# EAGLE board Qwiic-CO2_Sensor-SCD40-Panel (EAGLE 9.6.2), part 1 of 3
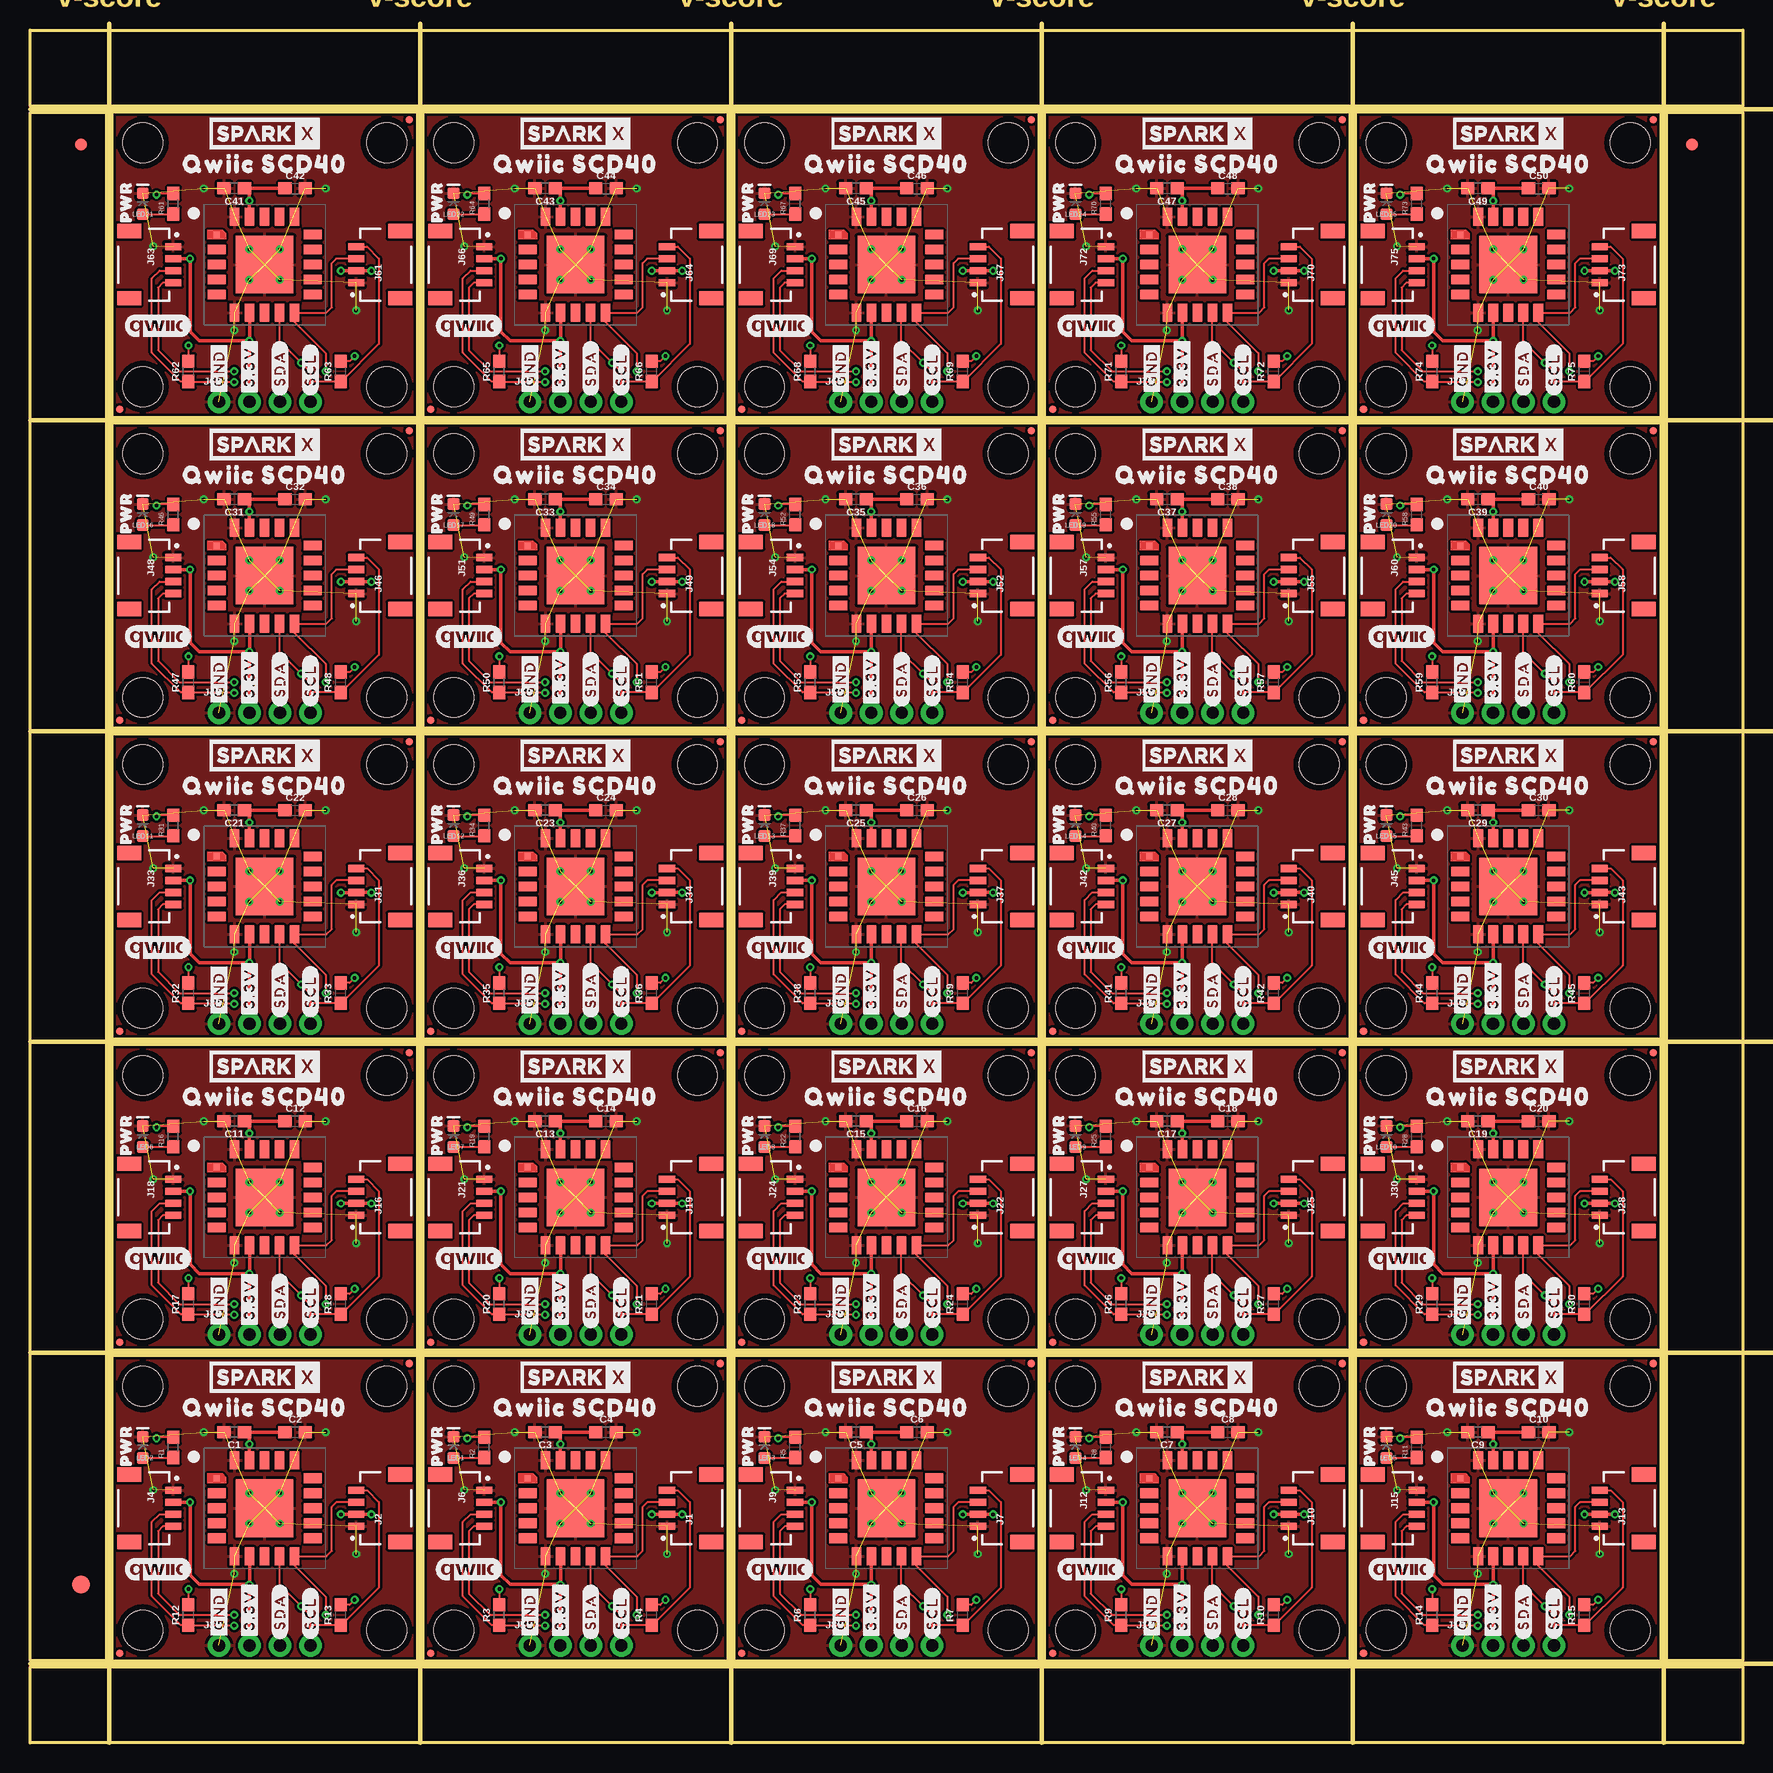
[diagram p0: board, top side]
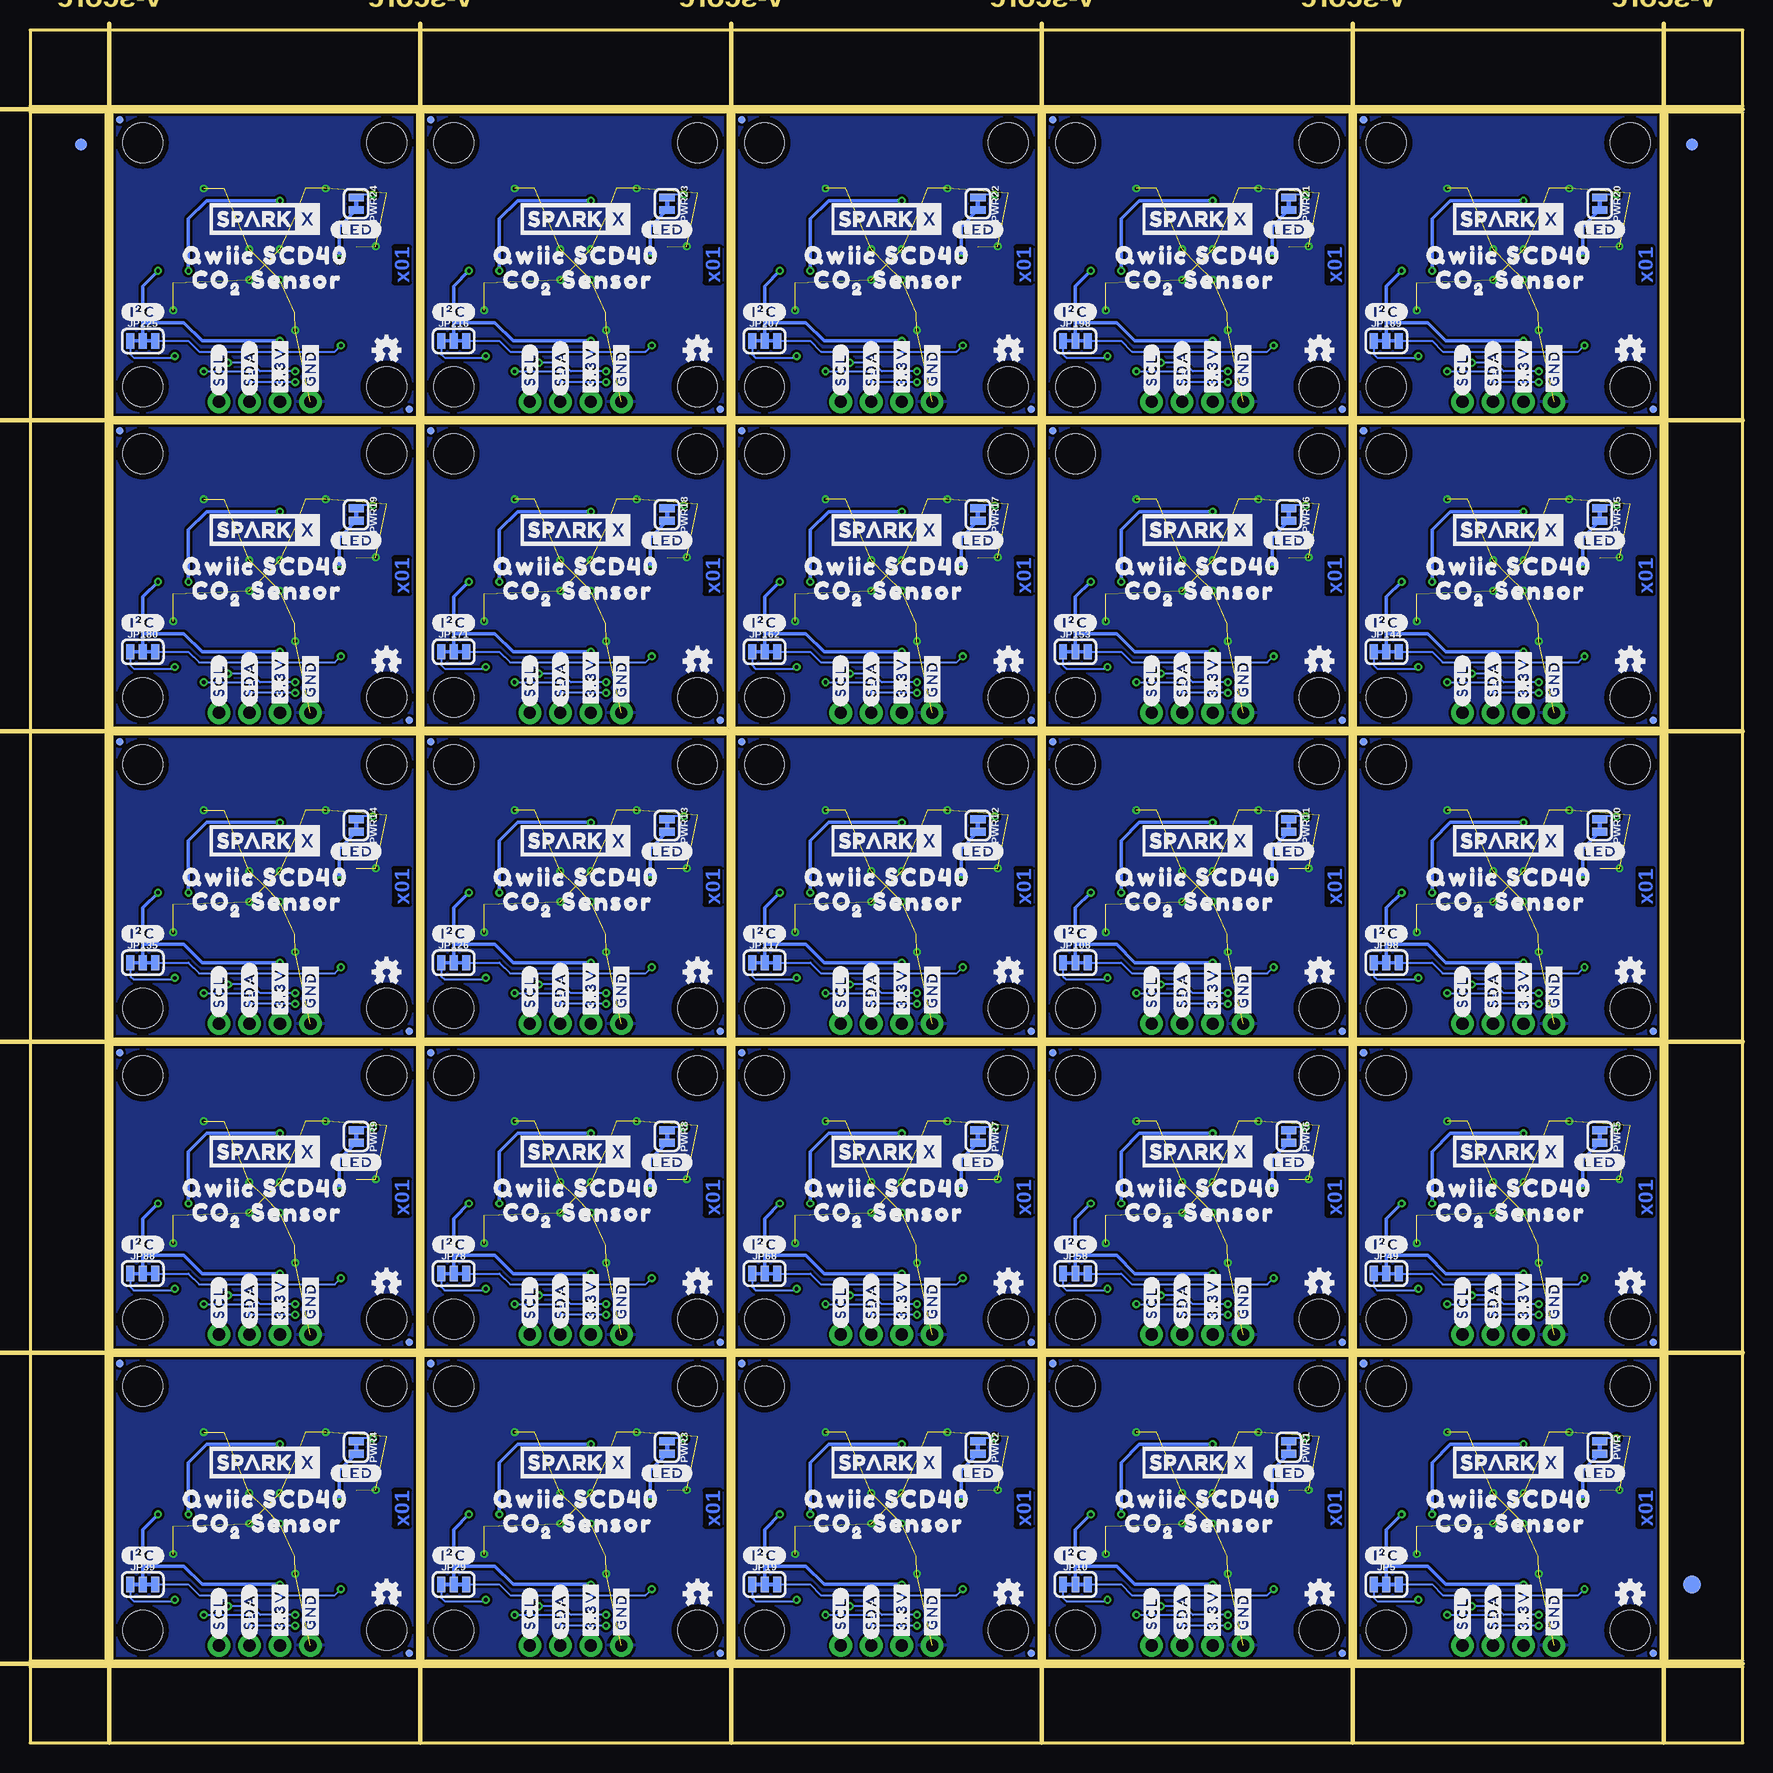
[diagram p1: board, bottom side, seen from below]

Size 142.75 x 142.75 mm. Coordinates in mm from the lower left corner, seen from the top.
Outline: 32.26,6.86 6.86,6.86 6.86,32.26 32.26,32.26 32.26,6.86
Outline: 58.17,6.86 32.77,6.86 32.77,32.26 58.17,32.26 58.17,6.86
Outline: 84.07,6.86 58.67,6.86 58.67,32.26 84.07,32.26 84.07,6.86
Outline: 109.98,6.86 84.58,6.86 84.58,32.26 109.98,32.26 109.98,6.86
Outline: 135.89,6.86 110.49,6.86 110.49,32.26 135.89,32.26 135.89,6.86
Outline: 32.26,32.77 6.86,32.77 6.86,58.17 32.26,58.17 32.26,32.77
Outline: 58.17,32.77 32.77,32.77 32.77,58.17 58.17,58.17 58.17,32.77
Outline: 84.07,32.77 58.67,32.77 58.67,58.17 84.07,58.17 84.07,32.77
Outline: 109.98,32.77 84.58,32.77 84.58,58.17 109.98,58.17 109.98,32.77
Outline: 135.89,32.77 110.49,32.77 110.49,58.17 135.89,58.17 135.89,32.77
Outline: 32.26,58.67 6.86,58.67 6.86,84.07 32.26,84.07 32.26,58.67
Outline: 58.17,58.67 32.77,58.67 32.77,84.07 58.17,84.07 58.17,58.67
Outline: 84.07,58.67 58.67,58.67 58.67,84.07 84.07,84.07 84.07,58.67
Outline: 109.98,58.67 84.58,58.67 84.58,84.07 109.98,84.07 109.98,58.67
Outline: 135.89,58.67 110.49,58.67 110.49,84.07 135.89,84.07 135.89,58.67
Outline: 32.26,84.58 6.86,84.58 6.86,109.98 32.26,109.98 32.26,84.58
Outline: 58.17,84.58 32.77,84.58 32.77,109.98 58.17,109.98 58.17,84.58
Outline: 84.07,84.58 58.67,84.58 58.67,109.98 84.07,109.98 84.07,84.58
Outline: 109.98,84.58 84.58,84.58 84.58,109.98 109.98,109.98 109.98,84.58
Outline: 135.89,84.58 110.49,84.58 110.49,109.98 135.89,109.98 135.89,84.58
Outline: 32.26,110.49 6.86,110.49 6.86,135.89 32.26,135.89 32.26,110.49
Outline: 58.17,110.49 32.77,110.49 32.77,135.89 58.17,135.89 58.17,110.49
Outline: 84.07,110.49 58.67,110.49 58.67,135.89 84.07,135.89 84.07,110.49
Outline: 109.98,110.49 84.58,110.49 84.58,135.89 109.98,135.89 109.98,110.49
Outline: 135.89,110.49 110.49,110.49 110.49,135.89 135.89,135.89 135.89,110.49
Outline: 0,6.35 142.75,6.35 142.75,0 0,0 0,6.35
Outline: 136.4,135.89 142.75,135.89 142.75,6.86 136.4,6.86 136.4,135.89
Outline: 0,142.75 142.75,142.75 142.75,136.4 0,136.4 0,142.75
Outline: 0,135.89 6.35,135.89 6.35,6.86 0,6.86 0,135.89
Copper layers (1*16): Top 0.035mm / dielectric 1.5mm / Bottom 0.035mm
Design rules "Qwiic-CO2_Sensor-SCD40": minimum track width 7mil, minimum drill 0.3mm, track to track 7mil, track to pad 7mil, pad to pad 7mil, via to via 7mil, smd to smd 7mil, copper to edge 7mil, drill to drill 7mil, minimum pad ring 7mil, minimum via ring 7mil, stop-mask expansion 4mil, vias tented up to drill 25mil, thermal gap 10mil
Net classes: 2 3.3V: width 0.305 mm
Milling: 12 lines

## Footprints (pad centres in the part's own frame; a part is rotated, then mirrored left to right if it is on the bottom)
0603 = smd 1.1 x 1: 1 -0.85,0; 2 0.85,0
FIDUCIAL-1X2 = smd 1 x 1: 1 0,0
FIDUCIAL-1.5X3 = smd 1.5 x 1.5: 1 0,0
JST04_1MM_RA = smd 0.6 x 1.35: 1 -1.5,0; 2 -0.5,0; 3 0.5,0; 4 1.5,0 | smd 1.2 x 2: NC1 2.8,-3.675; NC2 -2.8,-3.675
1X04_NO_SILK = drill 1.016 pad 1.88: 1 0,0; 2 2.54,0; 3 5.08,0; 4 7.62,0
STAND-OFF = hole 3.302: 0,0
MICRO-FIDUCIAL = smd 0.635 x 0.635: 1 0,0
SMT-JUMPER_3_2-NC_TRACE_SILK = smd 0.66 x 1.27: 1 -1.041,0; 2 0,0; 3 1.041,0
LED-0603 = smd 1 x 1: A -0.877,0; C 0.877,0
SMT-JUMPER_2_NC_TRACE_SILK = smd 0.66 x 1.27: 1 -0.521,0; 2 0.521,0
SCD4X = smd 0.5 x 0.5: 1 -4,2.5 | smd 1.5 x 0.8: 2 -4,1.25; 3 -4,0; 4 -4,-1.25; 5 -4,-2.5; 11 4,-2.5; 12 4,-1.25; 13 4,0; 14 4,1.25; 15 4,2.5 | smd 0.8 x 1.5: 6 -2.5,-4; 7 -1.25,-4; 8 0,-4; 9 1.25,-4; 10 2.5,-4; 16 2.5,4; 17 1.25,4; 18 0,4; 19 -1.25,4; 20 -2.5,4 | smd 4.8 x 4.8: CP 0,0

## Placement (x,y rotation side)
C1  0.1uF  [0603]  17.02,25.91 180 top
C2  4.7uF  [0603]  22.1,25.91 0 top
C3  0.1uF  [0603]  42.93,25.91 180 top
C4  4.7uF  [0603]  48.01,25.91 0 top
C5  0.1uF  [0603]  68.83,25.91 180 top
C6  4.7uF  [0603]  73.91,25.91 0 top
C7  0.1uF  [0603]  94.74,25.91 180 top
C8  4.7uF  [0603]  99.82,25.91 0 top
C9  0.1uF  [0603]  120.65,25.91 180 top
C10  4.7uF  [0603]  125.73,25.91 0 top
C11  0.1uF  [0603]  17.02,51.82 180 top
C12  4.7uF  [0603]  22.1,51.82 0 top
C13  0.1uF  [0603]  42.93,51.82 180 top
C14  4.7uF  [0603]  48.01,51.82 0 top
C15  0.1uF  [0603]  68.83,51.82 180 top
C16  4.7uF  [0603]  73.91,51.82 0 top
C17  0.1uF  [0603]  94.74,51.82 180 top
C18  4.7uF  [0603]  99.82,51.82 0 top
C19  0.1uF  [0603]  120.65,51.82 180 top
C20  4.7uF  [0603]  125.73,51.82 0 top
C21  0.1uF  [0603]  17.02,77.72 180 top
C22  4.7uF  [0603]  22.1,77.72 0 top
C23  0.1uF  [0603]  42.93,77.72 180 top
C24  4.7uF  [0603]  48.01,77.72 0 top
C25  0.1uF  [0603]  68.83,77.72 180 top
C26  4.7uF  [0603]  73.91,77.72 0 top
C27  0.1uF  [0603]  94.74,77.72 180 top
C28  4.7uF  [0603]  99.82,77.72 0 top
C29  0.1uF  [0603]  120.65,77.72 180 top
C30  4.7uF  [0603]  125.73,77.72 0 top
C31  0.1uF  [0603]  17.02,103.63 180 top
C32  4.7uF  [0603]  22.1,103.63 0 top
C33  0.1uF  [0603]  42.93,103.63 180 top
C34  4.7uF  [0603]  48.01,103.63 0 top
C35  0.1uF  [0603]  68.83,103.63 180 top
C36  4.7uF  [0603]  73.91,103.63 0 top
C37  0.1uF  [0603]  94.74,103.63 180 top
C38  4.7uF  [0603]  99.82,103.63 0 top
C39  0.1uF  [0603]  120.65,103.63 180 top
C40  4.7uF  [0603]  125.73,103.63 0 top
C41  0.1uF  [0603]  17.02,129.54 180 top
C42  4.7uF  [0603]  22.1,129.54 0 top
C43  0.1uF  [0603]  42.93,129.54 180 top
C44  4.7uF  [0603]  48.01,129.54 0 top
C45  0.1uF  [0603]  68.83,129.54 180 top
C46  4.7uF  [0603]  73.91,129.54 0 top
C47  0.1uF  [0603]  94.74,129.54 180 top
C48  4.7uF  [0603]  99.82,129.54 0 top
C49  0.1uF  [0603]  120.65,129.54 180 top
C50  4.7uF  [0603]  125.73,129.54 0 top
E$1  [FIDUCIAL-1X2]  4.23,133.22 0 top
E$2  [FIDUCIAL-1X2]  4.23,133.22 0 bottom
E$3  [FIDUCIAL-1X2]  138.51,133.22 0 top
E$4  [FIDUCIAL-1X2]  138.51,133.22 0 bottom
E$5  [FIDUCIAL-1.5X3]  4.23,13.21 0 top
E$6  [FIDUCIAL-1.5X3]  4.23,13.21 0 bottom
J1  Qwiic Right Angle  [JST04_1MM_RA]  53.09,19.56 90 top
J2  Qwiic Right Angle  [JST04_1MM_RA]  27.18,19.56 90 top
J3  PTH  [1X04_NO_SILK]  15.75,8.13 0 top
J4  Qwiic Right Angle  [JST04_1MM_RA]  11.94,19.56 270 top
J5  PTH  [1X04_NO_SILK]  41.66,8.13 0 top
J6  Qwiic Right Angle  [JST04_1MM_RA]  37.85,19.56 270 top
J7  Qwiic Right Angle  [JST04_1MM_RA]  78.99,19.56 90 top
J8  PTH  [1X04_NO_SILK]  67.56,8.13 0 top
J9  Qwiic Right Angle  [JST04_1MM_RA]  63.75,19.56 270 top
J10  Qwiic Right Angle  [JST04_1MM_RA]  104.9,19.56 90 top
J11  PTH  [1X04_NO_SILK]  93.47,8.13 0 top
J12  Qwiic Right Angle  [JST04_1MM_RA]  89.66,19.56 270 top
J13  Qwiic Right Angle  [JST04_1MM_RA]  130.81,19.56 90 top
J14  PTH  [1X04_NO_SILK]  119.38,8.13 0 top
J15  Qwiic Right Angle  [JST04_1MM_RA]  115.57,19.56 270 top
J16  Qwiic Right Angle  [JST04_1MM_RA]  27.18,45.47 90 top
J17  PTH  [1X04_NO_SILK]  15.75,34.04 0 top
J18  Qwiic Right Angle  [JST04_1MM_RA]  11.94,45.47 270 top
J19  Qwiic Right Angle  [JST04_1MM_RA]  53.09,45.47 90 top
J20  PTH  [1X04_NO_SILK]  41.66,34.04 0 top
J21  Qwiic Right Angle  [JST04_1MM_RA]  37.85,45.47 270 top
J22  Qwiic Right Angle  [JST04_1MM_RA]  78.99,45.47 90 top
J23  PTH  [1X04_NO_SILK]  67.56,34.04 0 top
J24  Qwiic Right Angle  [JST04_1MM_RA]  63.75,45.47 270 top
J25  Qwiic Right Angle  [JST04_1MM_RA]  104.9,45.47 90 top
J26  PTH  [1X04_NO_SILK]  93.47,34.04 0 top
J27  Qwiic Right Angle  [JST04_1MM_RA]  89.66,45.47 270 top
J28  Qwiic Right Angle  [JST04_1MM_RA]  130.81,45.47 90 top
J29  PTH  [1X04_NO_SILK]  119.38,34.04 0 top
J30  Qwiic Right Angle  [JST04_1MM_RA]  115.57,45.47 270 top
J31  Qwiic Right Angle  [JST04_1MM_RA]  27.18,71.37 90 top
J32  PTH  [1X04_NO_SILK]  15.75,59.94 0 top
J33  Qwiic Right Angle  [JST04_1MM_RA]  11.94,71.37 270 top
J34  Qwiic Right Angle  [JST04_1MM_RA]  53.09,71.37 90 top
J35  PTH  [1X04_NO_SILK]  41.66,59.94 0 top
J36  Qwiic Right Angle  [JST04_1MM_RA]  37.85,71.37 270 top
J37  Qwiic Right Angle  [JST04_1MM_RA]  78.99,71.37 90 top
J38  PTH  [1X04_NO_SILK]  67.56,59.94 0 top
J39  Qwiic Right Angle  [JST04_1MM_RA]  63.75,71.37 270 top
J40  Qwiic Right Angle  [JST04_1MM_RA]  104.9,71.37 90 top
J41  PTH  [1X04_NO_SILK]  93.47,59.94 0 top
J42  Qwiic Right Angle  [JST04_1MM_RA]  89.66,71.37 270 top
J43  Qwiic Right Angle  [JST04_1MM_RA]  130.81,71.37 90 top
J44  PTH  [1X04_NO_SILK]  119.38,59.94 0 top
J45  Qwiic Right Angle  [JST04_1MM_RA]  115.57,71.37 270 top
J46  Qwiic Right Angle  [JST04_1MM_RA]  27.18,97.28 90 top
J47  PTH  [1X04_NO_SILK]  15.75,85.85 0 top
J48  Qwiic Right Angle  [JST04_1MM_RA]  11.94,97.28 270 top
J49  Qwiic Right Angle  [JST04_1MM_RA]  53.09,97.28 90 top
J50  PTH  [1X04_NO_SILK]  41.66,85.85 0 top
J51  Qwiic Right Angle  [JST04_1MM_RA]  37.85,97.28 270 top
J52  Qwiic Right Angle  [JST04_1MM_RA]  78.99,97.28 90 top
J53  PTH  [1X04_NO_SILK]  67.56,85.85 0 top
J54  Qwiic Right Angle  [JST04_1MM_RA]  63.75,97.28 270 top
J55  Qwiic Right Angle  [JST04_1MM_RA]  104.9,97.28 90 top
J56  PTH  [1X04_NO_SILK]  93.47,85.85 0 top
J57  Qwiic Right Angle  [JST04_1MM_RA]  89.66,97.28 270 top
J58  Qwiic Right Angle  [JST04_1MM_RA]  130.81,97.28 90 top
J59  PTH  [1X04_NO_SILK]  119.38,85.85 0 top
J60  Qwiic Right Angle  [JST04_1MM_RA]  115.57,97.28 270 top
J61  Qwiic Right Angle  [JST04_1MM_RA]  27.18,123.19 90 top
J62  PTH  [1X04_NO_SILK]  15.75,111.76 0 top
J63  Qwiic Right Angle  [JST04_1MM_RA]  11.94,123.19 270 top
J64  Qwiic Right Angle  [JST04_1MM_RA]  53.09,123.19 90 top
J65  PTH  [1X04_NO_SILK]  41.66,111.76 0 top
J66  Qwiic Right Angle  [JST04_1MM_RA]  37.85,123.19 270 top
J67  Qwiic Right Angle  [JST04_1MM_RA]  78.99,123.19 90 top
J68  PTH  [1X04_NO_SILK]  67.56,111.76 0 top
J69  Qwiic Right Angle  [JST04_1MM_RA]  63.75,123.19 270 top
J70  Qwiic Right Angle  [JST04_1MM_RA]  104.9,123.19 90 top
J71  PTH  [1X04_NO_SILK]  93.47,111.76 0 top
J72  Qwiic Right Angle  [JST04_1MM_RA]  89.66,123.19 270 top
J73  Qwiic Right Angle  [JST04_1MM_RA]  130.81,123.19 90 top
J74  PTH  [1X04_NO_SILK]  119.38,111.76 0 top
J75  Qwiic Right Angle  [JST04_1MM_RA]  115.57,123.19 270 top
JP1  STAND-OFF  [STAND-OFF]  35.31,9.4 90 top
JP2  STAND-OFF  [STAND-OFF]  35.31,29.72 90 top
JP3  FIDUCIALUFIDUCIAL  [MICRO-FIDUCIAL]  57.53,31.62 90 top
JP4  FIDUCIALUFIDUCIAL  [MICRO-FIDUCIAL]  33.4,7.49 90 top
JP5  [SMT-JUMPER_3_2-NC_TRACE_SILK]  29.72,13.21 0 bottom
JP6  FIDUCIALUFIDUCIAL  [MICRO-FIDUCIAL]  57.53,31.62 270 bottom
JP7  FIDUCIALUFIDUCIAL  [MICRO-FIDUCIAL]  33.4,7.49 270 bottom
JP8  STAND-OFF  [STAND-OFF]  55.63,9.4 90 top
JP9  STAND-OFF  [STAND-OFF]  55.63,29.72 90 top
JP10  [SMT-JUMPER_3_2-NC_TRACE_SILK]  55.63,13.21 0 bottom
JP11  STAND-OFF  [STAND-OFF]  61.21,9.4 90 top
JP12  STAND-OFF  [STAND-OFF]  61.21,29.72 90 top
JP13  FIDUCIALUFIDUCIAL  [MICRO-FIDUCIAL]  83.44,31.62 90 top
JP14  FIDUCIALUFIDUCIAL  [MICRO-FIDUCIAL]  59.31,7.49 90 top
JP15  FIDUCIALUFIDUCIAL  [MICRO-FIDUCIAL]  83.44,31.62 270 bottom
JP16  FIDUCIALUFIDUCIAL  [MICRO-FIDUCIAL]  59.31,7.49 270 bottom
JP17  STAND-OFF  [STAND-OFF]  81.53,9.4 90 top
JP18  STAND-OFF  [STAND-OFF]  81.53,29.72 90 top
JP19  [SMT-JUMPER_3_2-NC_TRACE_SILK]  81.53,13.21 0 bottom
JP20  STAND-OFF  [STAND-OFF]  87.12,9.4 90 top
JP21  FIDUCIALUFIDUCIAL  [MICRO-FIDUCIAL]  31.62,31.62 90 top
JP22  STAND-OFF  [STAND-OFF]  87.12,29.72 90 top
JP23  FIDUCIALUFIDUCIAL  [MICRO-FIDUCIAL]  109.35,31.62 90 top
JP24  FIDUCIALUFIDUCIAL  [MICRO-FIDUCIAL]  85.22,7.49 90 top
JP25  FIDUCIALUFIDUCIAL  [MICRO-FIDUCIAL]  109.35,31.62 270 bottom
JP26  FIDUCIALUFIDUCIAL  [MICRO-FIDUCIAL]  85.22,7.49 270 bottom
JP27  STAND-OFF  [STAND-OFF]  107.44,9.4 90 top
JP28  STAND-OFF  [STAND-OFF]  107.44,29.72 90 top
JP29  [SMT-JUMPER_3_2-NC_TRACE_SILK]  107.44,13.21 0 bottom
JP30  STAND-OFF  [STAND-OFF]  113.03,9.4 90 top
JP31  STAND-OFF  [STAND-OFF]  9.4,9.4 90 top
JP32  STAND-OFF  [STAND-OFF]  113.03,29.72 90 top
JP33  FIDUCIALUFIDUCIAL  [MICRO-FIDUCIAL]  135.25,31.62 90 top
JP34  FIDUCIALUFIDUCIAL  [MICRO-FIDUCIAL]  111.12,7.49 90 top
JP35  FIDUCIALUFIDUCIAL  [MICRO-FIDUCIAL]  135.25,31.62 270 bottom
JP36  FIDUCIALUFIDUCIAL  [MICRO-FIDUCIAL]  111.12,7.49 270 bottom
JP37  STAND-OFF  [STAND-OFF]  133.35,9.4 90 top
JP38  STAND-OFF  [STAND-OFF]  133.35,29.72 90 top
JP39  [SMT-JUMPER_3_2-NC_TRACE_SILK]  133.35,13.21 0 bottom
JP40  STAND-OFF  [STAND-OFF]  9.4,35.31 90 top
JP41  STAND-OFF  [STAND-OFF]  9.4,29.72 90 top
JP42  STAND-OFF  [STAND-OFF]  9.4,55.63 90 top
JP43  FIDUCIALUFIDUCIAL  [MICRO-FIDUCIAL]  31.62,57.53 90 top
JP44  FIDUCIALUFIDUCIAL  [MICRO-FIDUCIAL]  7.49,33.4 90 top
JP45  FIDUCIALUFIDUCIAL  [MICRO-FIDUCIAL]  31.62,57.53 270 bottom
JP46  FIDUCIALUFIDUCIAL  [MICRO-FIDUCIAL]  7.49,33.4 270 bottom
JP47  STAND-OFF  [STAND-OFF]  29.72,35.31 90 top
JP48  STAND-OFF  [STAND-OFF]  29.72,55.63 90 top
JP49  [SMT-JUMPER_3_2-NC_TRACE_SILK]  29.72,39.12 0 bottom
JP50  STAND-OFF  [STAND-OFF]  35.31,35.31 90 top
JP51  STAND-OFF  [STAND-OFF]  35.31,55.63 90 top
JP52  FIDUCIALUFIDUCIAL  [MICRO-FIDUCIAL]  57.53,57.53 90 top
JP53  FIDUCIALUFIDUCIAL  [MICRO-FIDUCIAL]  33.4,33.4 90 top
JP54  FIDUCIALUFIDUCIAL  [MICRO-FIDUCIAL]  57.53,57.53 270 bottom
JP55  FIDUCIALUFIDUCIAL  [MICRO-FIDUCIAL]  33.4,33.4 270 bottom
JP56  STAND-OFF  [STAND-OFF]  55.63,35.31 90 top
JP57  STAND-OFF  [STAND-OFF]  55.63,55.63 90 top
JP58  [SMT-JUMPER_3_2-NC_TRACE_SILK]  55.63,39.12 0 bottom
JP59  STAND-OFF  [STAND-OFF]  61.21,35.31 90 top
JP60  STAND-OFF  [STAND-OFF]  61.21,55.63 90 top
JP61  FIDUCIALUFIDUCIAL  [MICRO-FIDUCIAL]  7.49,7.49 90 top
JP62  FIDUCIALUFIDUCIAL  [MICRO-FIDUCIAL]  83.44,57.53 90 top
JP63  FIDUCIALUFIDUCIAL  [MICRO-FIDUCIAL]  59.31,33.4 90 top
JP64  FIDUCIALUFIDUCIAL  [MICRO-FIDUCIAL]  83.44,57.53 270 bottom
JP65  FIDUCIALUFIDUCIAL  [MICRO-FIDUCIAL]  59.31,33.4 270 bottom
JP66  STAND-OFF  [STAND-OFF]  81.53,35.31 90 top
JP67  STAND-OFF  [STAND-OFF]  81.53,55.63 90 top
JP68  [SMT-JUMPER_3_2-NC_TRACE_SILK]  81.53,39.12 0 bottom
JP69  STAND-OFF  [STAND-OFF]  87.12,35.31 90 top
JP70  STAND-OFF  [STAND-OFF]  87.12,55.63 90 top
JP71  FIDUCIALUFIDUCIAL  [MICRO-FIDUCIAL]  31.62,31.62 270 bottom
JP72  FIDUCIALUFIDUCIAL  [MICRO-FIDUCIAL]  109.35,57.53 90 top
JP73  FIDUCIALUFIDUCIAL  [MICRO-FIDUCIAL]  85.22,33.4 90 top
JP74  FIDUCIALUFIDUCIAL  [MICRO-FIDUCIAL]  109.35,57.53 270 bottom
JP75  FIDUCIALUFIDUCIAL  [MICRO-FIDUCIAL]  85.22,33.4 270 bottom
JP76  STAND-OFF  [STAND-OFF]  107.44,35.31 90 top
JP77  STAND-OFF  [STAND-OFF]  107.44,55.63 90 top
JP78  [SMT-JUMPER_3_2-NC_TRACE_SILK]  107.44,39.12 0 bottom
JP79  STAND-OFF  [STAND-OFF]  113.03,35.31 90 top
JP80  STAND-OFF  [STAND-OFF]  113.03,55.63 90 top
JP81  FIDUCIALUFIDUCIAL  [MICRO-FIDUCIAL]  7.49,7.49 270 bottom
JP82  FIDUCIALUFIDUCIAL  [MICRO-FIDUCIAL]  135.25,57.53 90 top
JP83  FIDUCIALUFIDUCIAL  [MICRO-FIDUCIAL]  111.12,33.4 90 top
JP84  FIDUCIALUFIDUCIAL  [MICRO-FIDUCIAL]  135.25,57.53 270 bottom
JP85  FIDUCIALUFIDUCIAL  [MICRO-FIDUCIAL]  111.12,33.4 270 bottom
JP86  STAND-OFF  [STAND-OFF]  133.35,35.31 90 top
JP87  STAND-OFF  [STAND-OFF]  133.35,55.63 90 top
JP88  [SMT-JUMPER_3_2-NC_TRACE_SILK]  133.35,39.12 0 bottom
JP89  STAND-OFF  [STAND-OFF]  9.4,61.21 90 top
JP90  STAND-OFF  [STAND-OFF]  9.4,81.53 90 top
JP91  STAND-OFF  [STAND-OFF]  29.72,9.4 90 top
JP92  FIDUCIALUFIDUCIAL  [MICRO-FIDUCIAL]  31.62,83.44 90 top
JP93  FIDUCIALUFIDUCIAL  [MICRO-FIDUCIAL]  7.49,59.31 90 top
JP94  FIDUCIALUFIDUCIAL  [MICRO-FIDUCIAL]  31.62,83.44 270 bottom
JP95  FIDUCIALUFIDUCIAL  [MICRO-FIDUCIAL]  7.49,59.31 270 bottom
JP96  STAND-OFF  [STAND-OFF]  29.72,61.21 90 top
JP97  STAND-OFF  [STAND-OFF]  29.72,81.53 90 top
JP98  [SMT-JUMPER_3_2-NC_TRACE_SILK]  29.72,65.02 0 bottom
JP99  STAND-OFF  [STAND-OFF]  35.31,61.21 90 top
JP100  STAND-OFF  [STAND-OFF]  35.31,81.53 90 top
JP101  STAND-OFF  [STAND-OFF]  29.72,29.72 90 top
JP102  FIDUCIALUFIDUCIAL  [MICRO-FIDUCIAL]  57.53,83.44 90 top
JP103  FIDUCIALUFIDUCIAL  [MICRO-FIDUCIAL]  33.4,59.31 90 top
JP104  FIDUCIALUFIDUCIAL  [MICRO-FIDUCIAL]  57.53,83.44 270 bottom
JP105  FIDUCIALUFIDUCIAL  [MICRO-FIDUCIAL]  33.4,59.31 270 bottom
JP106  STAND-OFF  [STAND-OFF]  55.63,61.21 90 top
JP107  STAND-OFF  [STAND-OFF]  55.63,81.53 90 top
JP108  [SMT-JUMPER_3_2-NC_TRACE_SILK]  55.63,65.02 0 bottom
JP109  STAND-OFF  [STAND-OFF]  61.21,61.21 90 top
JP110  STAND-OFF  [STAND-OFF]  61.21,81.53 90 top
JP111  FIDUCIALUFIDUCIAL  [MICRO-FIDUCIAL]  83.44,83.44 90 top
JP112  FIDUCIALUFIDUCIAL  [MICRO-FIDUCIAL]  59.31,59.31 90 top
JP113  FIDUCIALUFIDUCIAL  [MICRO-FIDUCIAL]  83.44,83.44 270 bottom
JP114  FIDUCIALUFIDUCIAL  [MICRO-FIDUCIAL]  59.31,59.31 270 bottom
JP115  STAND-OFF  [STAND-OFF]  81.53,61.21 90 top
JP116  STAND-OFF  [STAND-OFF]  81.53,81.53 90 top
JP117  [SMT-JUMPER_3_2-NC_TRACE_SILK]  81.53,65.02 0 bottom
JP118  STAND-OFF  [STAND-OFF]  87.12,61.21 90 top
JP119  STAND-OFF  [STAND-OFF]  87.12,81.53 90 top
JP120  FIDUCIALUFIDUCIAL  [MICRO-FIDUCIAL]  109.35,83.44 90 top
JP121  FIDUCIALUFIDUCIAL  [MICRO-FIDUCIAL]  85.22,59.31 90 top
JP122  FIDUCIALUFIDUCIAL  [MICRO-FIDUCIAL]  109.35,83.44 270 bottom
JP123  FIDUCIALUFIDUCIAL  [MICRO-FIDUCIAL]  85.22,59.31 270 bottom
JP124  STAND-OFF  [STAND-OFF]  107.44,61.21 90 top
JP125  STAND-OFF  [STAND-OFF]  107.44,81.53 90 top
JP126  [SMT-JUMPER_3_2-NC_TRACE_SILK]  107.44,65.02 0 bottom
JP127  STAND-OFF  [STAND-OFF]  113.03,61.21 90 top
JP128  STAND-OFF  [STAND-OFF]  113.03,81.53 90 top
JP129  FIDUCIALUFIDUCIAL  [MICRO-FIDUCIAL]  135.25,83.44 90 top
JP130  FIDUCIALUFIDUCIAL  [MICRO-FIDUCIAL]  111.12,59.31 90 top
JP131  FIDUCIALUFIDUCIAL  [MICRO-FIDUCIAL]  135.25,83.44 270 bottom
JP132  FIDUCIALUFIDUCIAL  [MICRO-FIDUCIAL]  111.12,59.31 270 bottom
JP133  STAND-OFF  [STAND-OFF]  133.35,61.21 90 top
JP134  STAND-OFF  [STAND-OFF]  133.35,81.53 90 top
JP135  [SMT-JUMPER_3_2-NC_TRACE_SILK]  133.35,65.02 0 bottom
JP136  STAND-OFF  [STAND-OFF]  9.4,87.12 90 top
JP137  STAND-OFF  [STAND-OFF]  9.4,107.44 90 top
JP138  FIDUCIALUFIDUCIAL  [MICRO-FIDUCIAL]  31.62,109.35 90 top
JP139  FIDUCIALUFIDUCIAL  [MICRO-FIDUCIAL]  7.49,85.22 90 top
JP140  FIDUCIALUFIDUCIAL  [MICRO-FIDUCIAL]  31.62,109.35 270 bottom
JP141  FIDUCIALUFIDUCIAL  [MICRO-FIDUCIAL]  7.49,85.22 270 bottom
JP142  STAND-OFF  [STAND-OFF]  29.72,87.12 90 top
JP143  STAND-OFF  [STAND-OFF]  29.72,107.44 90 top
JP144  [SMT-JUMPER_3_2-NC_TRACE_SILK]  29.72,90.93 0 bottom
JP145  STAND-OFF  [STAND-OFF]  35.31,87.12 90 top
JP146  STAND-OFF  [STAND-OFF]  35.31,107.44 90 top
JP147  FIDUCIALUFIDUCIAL  [MICRO-FIDUCIAL]  57.53,109.35 90 top
JP148  FIDUCIALUFIDUCIAL  [MICRO-FIDUCIAL]  33.4,85.22 90 top
JP149  FIDUCIALUFIDUCIAL  [MICRO-FIDUCIAL]  57.53,109.35 270 bottom
JP150  FIDUCIALUFIDUCIAL  [MICRO-FIDUCIAL]  33.4,85.22 270 bottom
JP151  STAND-OFF  [STAND-OFF]  55.63,87.12 90 top
JP152  STAND-OFF  [STAND-OFF]  55.63,107.44 90 top
JP153  [SMT-JUMPER_3_2-NC_TRACE_SILK]  55.63,90.93 0 bottom
JP154  STAND-OFF  [STAND-OFF]  61.21,87.12 90 top
JP155  STAND-OFF  [STAND-OFF]  61.21,107.44 90 top
JP156  FIDUCIALUFIDUCIAL  [MICRO-FIDUCIAL]  83.44,109.35 90 top
JP157  FIDUCIALUFIDUCIAL  [MICRO-FIDUCIAL]  59.31,85.22 90 top
JP158  FIDUCIALUFIDUCIAL  [MICRO-FIDUCIAL]  83.44,109.35 270 bottom
JP159  FIDUCIALUFIDUCIAL  [MICRO-FIDUCIAL]  59.31,85.22 270 bottom
JP160  STAND-OFF  [STAND-OFF]  81.53,87.12 90 top
JP161  STAND-OFF  [STAND-OFF]  81.53,107.44 90 top
JP162  [SMT-JUMPER_3_2-NC_TRACE_SILK]  81.53,90.93 0 bottom
JP163  STAND-OFF  [STAND-OFF]  87.12,87.12 90 top
JP164  STAND-OFF  [STAND-OFF]  87.12,107.44 90 top
JP165  FIDUCIALUFIDUCIAL  [MICRO-FIDUCIAL]  109.35,109.35 90 top
JP166  FIDUCIALUFIDUCIAL  [MICRO-FIDUCIAL]  85.22,85.22 90 top
JP167  FIDUCIALUFIDUCIAL  [MICRO-FIDUCIAL]  109.35,109.35 270 bottom
JP168  FIDUCIALUFIDUCIAL  [MICRO-FIDUCIAL]  85.22,85.22 270 bottom
JP169  STAND-OFF  [STAND-OFF]  107.44,87.12 90 top
JP170  STAND-OFF  [STAND-OFF]  107.44,107.44 90 top
JP171  [SMT-JUMPER_3_2-NC_TRACE_SILK]  107.44,90.93 0 bottom
JP172  STAND-OFF  [STAND-OFF]  113.03,87.12 90 top
JP173  STAND-OFF  [STAND-OFF]  113.03,107.44 90 top
JP174  FIDUCIALUFIDUCIAL  [MICRO-FIDUCIAL]  135.25,109.35 90 top
JP175  FIDUCIALUFIDUCIAL  [MICRO-FIDUCIAL]  111.12,85.22 90 top
JP176  FIDUCIALUFIDUCIAL  [MICRO-FIDUCIAL]  135.25,109.35 270 bottom
JP177  FIDUCIALUFIDUCIAL  [MICRO-FIDUCIAL]  111.12,85.22 270 bottom
JP178  STAND-OFF  [STAND-OFF]  133.35,87.12 90 top
JP179  STAND-OFF  [STAND-OFF]  133.35,107.44 90 top
JP180  [SMT-JUMPER_3_2-NC_TRACE_SILK]  133.35,90.93 0 bottom
JP181  STAND-OFF  [STAND-OFF]  9.4,113.03 90 top
JP182  STAND-OFF  [STAND-OFF]  9.4,133.35 90 top
JP183  FIDUCIALUFIDUCIAL  [MICRO-FIDUCIAL]  31.62,135.25 90 top
JP184  FIDUCIALUFIDUCIAL  [MICRO-FIDUCIAL]  7.49,111.12 90 top
JP185  FIDUCIALUFIDUCIAL  [MICRO-FIDUCIAL]  31.62,135.25 270 bottom
JP186  FIDUCIALUFIDUCIAL  [MICRO-FIDUCIAL]  7.49,111.12 270 bottom
JP187  STAND-OFF  [STAND-OFF]  29.72,113.03 90 top
JP188  STAND-OFF  [STAND-OFF]  29.72,133.35 90 top
JP189  [SMT-JUMPER_3_2-NC_TRACE_SILK]  29.72,116.84 0 bottom
JP190  STAND-OFF  [STAND-OFF]  35.31,113.03 90 top
JP191  STAND-OFF  [STAND-OFF]  35.31,133.35 90 top
JP192  FIDUCIALUFIDUCIAL  [MICRO-FIDUCIAL]  57.53,135.25 90 top
JP193  FIDUCIALUFIDUCIAL  [MICRO-FIDUCIAL]  33.4,111.12 90 top
JP194  FIDUCIALUFIDUCIAL  [MICRO-FIDUCIAL]  57.53,135.25 270 bottom
JP195  FIDUCIALUFIDUCIAL  [MICRO-FIDUCIAL]  33.4,111.12 270 bottom
JP196  STAND-OFF  [STAND-OFF]  55.63,113.03 90 top
JP197  STAND-OFF  [STAND-OFF]  55.63,133.35 90 top
JP198  [SMT-JUMPER_3_2-NC_TRACE_SILK]  55.63,116.84 0 bottom
JP199  STAND-OFF  [STAND-OFF]  61.21,113.03 90 top
JP200  STAND-OFF  [STAND-OFF]  61.21,133.35 90 top
JP201  FIDUCIALUFIDUCIAL  [MICRO-FIDUCIAL]  83.44,135.25 90 top
JP202  FIDUCIALUFIDUCIAL  [MICRO-FIDUCIAL]  59.31,111.12 90 top
JP203  FIDUCIALUFIDUCIAL  [MICRO-FIDUCIAL]  83.44,135.25 270 bottom
JP204  FIDUCIALUFIDUCIAL  [MICRO-FIDUCIAL]  59.31,111.12 270 bottom
JP205  STAND-OFF  [STAND-OFF]  81.53,113.03 90 top
JP206  STAND-OFF  [STAND-OFF]  81.53,133.35 90 top
JP207  [SMT-JUMPER_3_2-NC_TRACE_SILK]  81.53,116.84 0 bottom
JP208  STAND-OFF  [STAND-OFF]  87.12,113.03 90 top
JP209  STAND-OFF  [STAND-OFF]  87.12,133.35 90 top
JP210  FIDUCIALUFIDUCIAL  [MICRO-FIDUCIAL]  109.35,135.25 90 top
JP211  FIDUCIALUFIDUCIAL  [MICRO-FIDUCIAL]  85.22,111.12 90 top
JP212  FIDUCIALUFIDUCIAL  [MICRO-FIDUCIAL]  109.35,135.25 270 bottom
JP213  FIDUCIALUFIDUCIAL  [MICRO-FIDUCIAL]  85.22,111.12 270 bottom
JP214  STAND-OFF  [STAND-OFF]  107.44,113.03 90 top
JP215  STAND-OFF  [STAND-OFF]  107.44,133.35 90 top
JP216  [SMT-JUMPER_3_2-NC_TRACE_SILK]  107.44,116.84 0 bottom
JP217  STAND-OFF  [STAND-OFF]  113.03,113.03 90 top
JP218  STAND-OFF  [STAND-OFF]  113.03,133.35 90 top
JP219  FIDUCIALUFIDUCIAL  [MICRO-FIDUCIAL]  135.25,135.25 90 top
JP220  FIDUCIALUFIDUCIAL  [MICRO-FIDUCIAL]  111.12,111.12 90 top
JP221  FIDUCIALUFIDUCIAL  [MICRO-FIDUCIAL]  135.25,135.25 270 bottom
JP222  FIDUCIALUFIDUCIAL  [MICRO-FIDUCIAL]  111.12,111.12 270 bottom
JP223  STAND-OFF  [STAND-OFF]  133.35,113.03 90 top
JP224  STAND-OFF  [STAND-OFF]  133.35,133.35 90 top
JP225  [SMT-JUMPER_3_2-NC_TRACE_SILK]  133.35,116.84 0 bottom
LED1  RED  [LED-0603]  35.31,24.64 90 top
LED2  RED  [LED-0603]  9.4,24.64 90 top
LED3  RED  [LED-0603]  61.21,24.64 90 top
LED4  RED  [LED-0603]  87.12,24.64 90 top
LED5  RED  [LED-0603]  113.03,24.64 90 top
LED6  RED  [LED-0603]  9.4,50.55 90 top
LED7  RED  [LED-0603]  35.31,50.55 90 top
LED8  RED  [LED-0603]  61.21,50.55 90 top
LED9  RED  [LED-0603]  87.12,50.55 90 top
LED10  RED  [LED-0603]  113.03,50.55 90 top
LED11  RED  [LED-0603]  9.4,76.45 90 top
LED12  RED  [LED-0603]  35.31,76.45 90 top
LED13  RED  [LED-0603]  61.21,76.45 90 top
LED14  RED  [LED-0603]  87.12,76.45 90 top
LED15  RED  [LED-0603]  113.03,76.45 90 top
LED16  RED  [LED-0603]  9.4,102.36 90 top
LED17  RED  [LED-0603]  35.31,102.36 90 top
LED18  RED  [LED-0603]  61.21,102.36 90 top
LED19  RED  [LED-0603]  87.12,102.36 90 top
LED20  RED  [LED-0603]  113.03,102.36 90 top
LED21  RED  [LED-0603]  9.4,128.27 90 top
LED22  RED  [LED-0603]  35.31,128.27 90 top
LED23  RED  [LED-0603]  61.21,128.27 90 top
LED24  RED  [LED-0603]  87.12,128.27 90 top
LED25  RED  [LED-0603]  113.03,128.27 90 top
LOGO1  OSHW-LOGOMINI  [OSHW-LOGO-MINI]  9.4,12.45 0 bottom
LOGO2  OSHW-LOGOMINI  [OSHW-LOGO-MINI]  35.31,12.45 0 bottom
LOGO3  OSHW-LOGOMINI  [OSHW-LOGO-MINI]  61.21,12.45 0 bottom
LOGO4  OSHW-LOGOMINI  [OSHW-LOGO-MINI]  87.12,12.45 0 bottom
LOGO5  OSHW-LOGOMINI  [OSHW-LOGO-MINI]  113.03,12.45 0 bottom
LOGO6  OSHW-LOGOMINI  [OSHW-LOGO-MINI]  9.4,38.35 0 bottom
LOGO7  OSHW-LOGOMINI  [OSHW-LOGO-MINI]  35.31,38.35 0 bottom
LOGO8  OSHW-LOGOMINI  [OSHW-LOGO-MINI]  61.21,38.35 0 bottom
LOGO9  OSHW-LOGOMINI  [OSHW-LOGO-MINI]  87.12,38.35 0 bottom
LOGO10  OSHW-LOGOMINI  [OSHW-LOGO-MINI]  113.03,38.35 0 bottom
LOGO11  OSHW-LOGOMINI  [OSHW-LOGO-MINI]  9.4,64.26 0 bottom
LOGO12  OSHW-LOGOMINI  [OSHW-LOGO-MINI]  35.31,64.26 0 bottom
LOGO13  OSHW-LOGOMINI  [OSHW-LOGO-MINI]  61.21,64.26 0 bottom
LOGO14  OSHW-LOGOMINI  [OSHW-LOGO-MINI]  87.12,64.26 0 bottom
LOGO15  OSHW-LOGOMINI  [OSHW-LOGO-MINI]  113.03,64.26 0 bottom
LOGO16  OSHW-LOGOMINI  [OSHW-LOGO-MINI]  9.4,90.17 0 bottom
LOGO17  OSHW-LOGOMINI  [OSHW-LOGO-MINI]  35.31,90.17 0 bottom
LOGO18  OSHW-LOGOMINI  [OSHW-LOGO-MINI]  61.21,90.17 0 bottom
LOGO19  OSHW-LOGOMINI  [OSHW-LOGO-MINI]  87.12,90.17 0 bottom
LOGO20  OSHW-LOGOMINI  [OSHW-LOGO-MINI]  113.03,90.17 0 bottom
LOGO21  OSHW-LOGOMINI  [OSHW-LOGO-MINI]  9.4,116.08 0 bottom
LOGO22  OSHW-LOGOMINI  [OSHW-LOGO-MINI]  35.31,116.08 0 bottom
LOGO23  OSHW-LOGOMINI  [OSHW-LOGO-MINI]  61.21,116.08 0 bottom
LOGO24  OSHW-LOGOMINI  [OSHW-LOGO-MINI]  87.12,116.08 0 bottom
LOGO25  OSHW-LOGOMINI  [OSHW-LOGO-MINI]  113.03,116.08 0 bottom
PWR  [SMT-JUMPER_2_NC_TRACE_SILK]  11.94,24.64 270 bottom
PWR1  [SMT-JUMPER_2_NC_TRACE_SILK]  37.85,24.64 270 bottom
PWR2  [SMT-JUMPER_2_NC_TRACE_SILK]  63.75,24.64 270 bottom
PWR3  [SMT-JUMPER_2_NC_TRACE_SILK]  89.66,24.64 270 bottom
PWR4  [SMT-JUMPER_2_NC_TRACE_SILK]  115.57,24.64 270 bottom
PWR5  [SMT-JUMPER_2_NC_TRACE_SILK]  11.94,50.55 270 bottom
PWR6  [SMT-JUMPER_2_NC_TRACE_SILK]  37.85,50.55 270 bottom
PWR7  [SMT-JUMPER_2_NC_TRACE_SILK]  63.75,50.55 270 bottom
PWR8  [SMT-JUMPER_2_NC_TRACE_SILK]  89.66,50.55 270 bottom
PWR9  [SMT-JUMPER_2_NC_TRACE_SILK]  115.57,50.55 270 bottom
PWR10  [SMT-JUMPER_2_NC_TRACE_SILK]  11.94,76.45 270 bottom
PWR11  [SMT-JUMPER_2_NC_TRACE_SILK]  37.85,76.45 270 bottom
PWR12  [SMT-JUMPER_2_NC_TRACE_SILK]  63.75,76.45 270 bottom
PWR13  [SMT-JUMPER_2_NC_TRACE_SILK]  89.66,76.45 270 bottom
PWR14  [SMT-JUMPER_2_NC_TRACE_SILK]  115.57,76.45 270 bottom
PWR15  [SMT-JUMPER_2_NC_TRACE_SILK]  11.94,102.36 270 bottom
PWR16  [SMT-JUMPER_2_NC_TRACE_SILK]  37.85,102.36 270 bottom
PWR17  [SMT-JUMPER_2_NC_TRACE_SILK]  63.75,102.36 270 bottom
PWR18  [SMT-JUMPER_2_NC_TRACE_SILK]  89.66,102.36 270 bottom
PWR19  [SMT-JUMPER_2_NC_TRACE_SILK]  115.57,102.36 270 bottom
PWR20  [SMT-JUMPER_2_NC_TRACE_SILK]  11.94,128.27 270 bottom
PWR21  [SMT-JUMPER_2_NC_TRACE_SILK]  37.85,128.27 270 bottom
PWR22  [SMT-JUMPER_2_NC_TRACE_SILK]  63.75,128.27 270 bottom
PWR23  [SMT-JUMPER_2_NC_TRACE_SILK]  89.66,128.27 270 bottom
PWR24  [SMT-JUMPER_2_NC_TRACE_SILK]  115.57,128.27 270 bottom
R1  1k  [0603]  11.94,24.64 90 top
R2  1k  [0603]  37.85,24.64 90 top
R3  2.2k  [0603]  39.12,10.67 90 top
R4  2.2k  [0603]  51.82,10.67 90 top
R5  1k  [0603]  63.75,24.64 90 top
R6  2.2k  [0603]  65.02,10.67 90 top
R7  2.2k  [0603]  77.72,10.67 90 top
R8  1k  [0603]  89.66,24.64 90 top
R9  2.2k  [0603]  90.93,10.67 90 top
R10  2.2k  [0603]  103.63,10.67 90 top
R11  1k  [0603]  115.57,24.64 90 top
R12  2.2k  [0603]  13.21,10.67 90 top
R13  2.2k  [0603]  25.91,10.67 90 top
R14  2.2k  [0603]  116.84,10.67 90 top
R15  2.2k  [0603]  129.54,10.67 90 top
R16  1k  [0603]  11.94,50.55 90 top
R17  2.2k  [0603]  13.21,36.58 90 top
R18  2.2k  [0603]  25.91,36.58 90 top
R19  1k  [0603]  37.85,50.55 90 top
R20  2.2k  [0603]  39.12,36.58 90 top
R21  2.2k  [0603]  51.82,36.58 90 top
R22  1k  [0603]  63.75,50.55 90 top
R23  2.2k  [0603]  65.02,36.58 90 top
R24  2.2k  [0603]  77.72,36.58 90 top
R25  1k  [0603]  89.66,50.55 90 top
R26  2.2k  [0603]  90.93,36.58 90 top
R27  2.2k  [0603]  103.63,36.58 90 top
R28  1k  [0603]  115.57,50.55 90 top
R29  2.2k  [0603]  116.84,36.58 90 top
R30  2.2k  [0603]  129.54,36.58 90 top
R31  1k  [0603]  11.94,76.45 90 top
R32  2.2k  [0603]  13.21,62.48 90 top
R33  2.2k  [0603]  25.91,62.48 90 top
R34  1k  [0603]  37.85,76.45 90 top
R35  2.2k  [0603]  39.12,62.48 90 top
R36  2.2k  [0603]  51.82,62.48 90 top
R37  1k  [0603]  63.75,76.45 90 top
R38  2.2k  [0603]  65.02,62.48 90 top
R39  2.2k  [0603]  77.72,62.48 90 top
R40  1k  [0603]  89.66,76.45 90 top
R41  2.2k  [0603]  90.93,62.48 90 top
R42  2.2k  [0603]  103.63,62.48 90 top
R43  1k  [0603]  115.57,76.45 90 top
R44  2.2k  [0603]  116.84,62.48 90 top
R45  2.2k  [0603]  129.54,62.48 90 top
R46  1k  [0603]  11.94,102.36 90 top
R47  2.2k  [0603]  13.21,88.39 90 top
R48  2.2k  [0603]  25.91,88.39 90 top
R49  1k  [0603]  37.85,102.36 90 top
R50  2.2k  [0603]  39.12,88.39 90 top
R51  2.2k  [0603]  51.82,88.39 90 top
R52  1k  [0603]  63.75,102.36 90 top
R53  2.2k  [0603]  65.02,88.39 90 top
R54  2.2k  [0603]  77.72,88.39 90 top
R55  1k  [0603]  89.66,102.36 90 top
R56  2.2k  [0603]  90.93,88.39 90 top
R57  2.2k  [0603]  103.63,88.39 90 top
R58  1k  [0603]  115.57,102.36 90 top
R59  2.2k  [0603]  116.84,88.39 90 top
R60  2.2k  [0603]  129.54,88.39 90 top
R61  1k  [0603]  11.94,128.27 90 top
R62  2.2k  [0603]  13.21,114.3 90 top
R63  2.2k  [0603]  25.91,114.3 90 top
R64  1k  [0603]  37.85,128.27 90 top
R65  2.2k  [0603]  39.12,114.3 90 top
R66  2.2k  [0603]  51.82,114.3 90 top
R67  1k  [0603]  63.75,128.27 90 top
R68  2.2k  [0603]  65.02,114.3 90 top
R69  2.2k  [0603]  77.72,114.3 90 top
R70  1k  [0603]  89.66,128.27 90 top
R71  2.2k  [0603]  90.93,114.3 90 top
R72  2.2k  [0603]  103.63,114.3 90 top
R73  1k  [0603]  115.57,128.27 90 top
R74  2.2k  [0603]  116.84,114.3 90 top
R75  2.2k  [0603]  129.54,114.3 90 top
U1  SCD4X  [SCD4X]  45.47,19.56 0 top
U2  SCD4X  [SCD4X]  71.37,19.56 0 top
U3  SCD4X  [SCD4X]  19.56,19.56 0 top
U4  SCD4X  [SCD4X]  97.28,19.56 0 top
U5  SCD4X  [SCD4X]  123.19,19.56 0 top
U6  SCD4X  [SCD4X]  19.56,45.47 0 top
U7  SCD4X  [SCD4X]  45.47,45.47 0 top
U8  SCD4X  [SCD4X]  71.37,45.47 0 top
U9  SCD4X  [SCD4X]  97.28,45.47 0 top
U10  SCD4X  [SCD4X]  123.19,45.47 0 top
U11  SCD4X  [SCD4X]  19.56,71.37 0 top
U12  SCD4X  [SCD4X]  45.47,71.37 0 top
U13  SCD4X  [SCD4X]  71.37,71.37 0 top
U14  SCD4X  [SCD4X]  97.28,71.37 0 top
U15  SCD4X  [SCD4X]  123.19,71.37 0 top
U16  SCD4X  [SCD4X]  19.56,97.28 0 top
U17  SCD4X  [SCD4X]  45.47,97.28 0 top
U18  SCD4X  [SCD4X]  71.37,97.28 0 top
U19  SCD4X  [SCD4X]  97.28,97.28 0 top
U20  SCD4X  [SCD4X]  123.19,97.28 0 top
U21  SCD4X  [SCD4X]  19.56,123.19 0 top
U22  SCD4X  [SCD4X]  45.47,123.19 0 top
U23  SCD4X  [SCD4X]  71.37,123.19 0 top
U24  SCD4X  [SCD4X]  97.28,123.19 0 top
U25  SCD4X  [SCD4X]  123.19,123.19 0 top
U$1  [CO1]  24,18.29 0 bottom
U$2  [SCD400]  22.86,27.94 0 top
U$3  [QWIIC0]  15.75,27.94 0 top
U$4  [QWIIC0]  23.37,20.32 0 bottom
U$5  SPARKX-LOGO4  [SPARKX-MEDIUM]  19.56,30.48 0 top
U$6  [#3#3V#0]  18.29,11.05 90 bottom
U$7  [#SDA#0]  20.83,10.92 90 bottom
U$8  [#SCL#0]  23.37,10.79 90 bottom
U$9  [#GND#0]  15.75,10.92 90 bottom
U$10  [#I�C#1]  29.72,15.62 0 bottom
U$11  [SCD400]  16.13,20.32 0 bottom
U$12  [PWR0]  8,24.77 90 top
U$13  [SENSOR3]  16.89,18.29 0 bottom
U$14  [20]  21.97,17.53 0 bottom
U$15  SPARKX-LOGO4  [SPARKX-MEDIUM]  45.47,30.48 0 top
U$16  [#3#3V#0]  44.2,11.05 90 top
U$17  [#SDA#0]  46.74,10.92 90 top
U$18  [#SCL#0]  49.28,10.79 90 top
U$19  [#3#3V#0]  44.2,11.05 90 bottom
U$20  [#SDA#0]  46.74,10.92 90 bottom
U$21  [#SCL#0]  49.28,10.79 90 bottom
U$22  [#GND#0]  41.66,10.92 90 top
U$23  [#LED#0]  11.94,22.48 0 bottom
U$24  [#GND#0]  41.66,10.92 90 bottom
U$25  [#I�C#1]  55.63,15.62 0 bottom
U$26  [PWR0]  33.91,24.77 90 top
U$27  [#LED#0]  37.85,22.48 0 bottom
U$28  SPARKX-LOGO4  [SPARKX-MEDIUM]  45.47,23.37 0 bottom
U$29  [QWIIC_5.5MM]  36.58,14.48 0 top
U$30  [CO1]  49.91,18.29 0 bottom
U$31  [QWIIC0]  41.66,27.94 0 top
U$32  [QWIIC0]  49.28,20.32 0 bottom
U$33  [#GND#0]  15.75,10.92 90 top
U$34  [#3#3V#0]  18.29,11.05 90 top
U$35  [#SDA#0]  20.83,10.92 90 top
U$36  [#SCL#0]  23.37,10.79 90 top
U$37  [SENSOR3]  42.8,18.29 0 bottom
U$38  SPARKX-LOGO4  [SPARKX-MEDIUM]  19.56,23.37 0 bottom
U$39  [20]  47.88,17.53 0 bottom
U$40  [SCD400]  48.77,27.94 0 top
U$41  [SCD400]  42.04,20.32 0 bottom
U$42  [QWIIC_5.5MM]  10.67,14.48 0 top
U$43  SPARKX-LOGO4  [SPARKX-MEDIUM]  71.37,30.48 0 top
U$44  [#3#3V#0]  70.1,11.05 90 top
U$45  [#SDA#0]  72.64,10.92 90 top
U$46  [#SCL#0]  75.18,10.79 90 top
U$47  [#3#3V#0]  70.1,11.05 90 bottom
U$48  [#SDA#0]  72.64,10.92 90 bottom
U$49  [#SCL#0]  75.18,10.79 90 bottom
U$50  [#GND#0]  67.56,10.92 90 top
U$51  [#GND#0]  67.56,10.92 90 bottom
U$52  [#I�C#1]  81.53,15.62 0 bottom
U$53  [PWR0]  59.82,24.77 90 top
U$54  [#LED#0]  63.75,22.48 0 bottom
U$55  SPARKX-LOGO4  [SPARKX-MEDIUM]  71.37,23.37 0 bottom
U$56  [QWIIC_5.5MM]  62.48,14.48 0 top
U$57  [CO1]  75.82,18.29 0 bottom
U$58  [QWIIC0]  67.56,27.94 0 top
U$59  [QWIIC0]  75.18,20.32 0 bottom
U$60  [SENSOR3]  68.71,18.29 0 bottom
U$61  [20]  73.79,17.53 0 bottom
U$62  [SCD400]  74.68,27.94 0 top
U$63  [SCD400]  67.95,20.32 0 bottom
U$64  SPARKX-LOGO4  [SPARKX-MEDIUM]  97.28,30.48 0 top
U$65  [#3#3V#0]  96.01,11.05 90 top
U$66  [#SDA#0]  98.55,10.92 90 top
U$67  [#SCL#0]  101.09,10.79 90 top
U$68  [#3#3V#0]  96.01,11.05 90 bottom
U$69  [#SDA#0]  98.55,10.92 90 bottom
U$70  [#SCL#0]  101.09,10.79 90 bottom
U$71  [#GND#0]  93.47,10.92 90 top
U$72  [#GND#0]  93.47,10.92 90 bottom
U$73  [#I�C#1]  107.44,15.62 0 bottom
U$74  [PWR0]  85.73,24.77 90 top
U$75  [#LED#0]  89.66,22.48 0 bottom
U$76  SPARKX-LOGO4  [SPARKX-MEDIUM]  97.28,23.37 0 bottom
U$77  [QWIIC_5.5MM]  88.39,14.48 0 top
U$78  [CO1]  101.73,18.29 0 bottom
U$79  [QWIIC0]  93.47,27.94 0 top
U$80  [QWIIC0]  101.09,20.32 0 bottom
U$81  [SENSOR3]  94.62,18.29 0 bottom
U$82  [20]  99.7,17.53 0 bottom
U$83  [SCD400]  100.58,27.94 0 top
U$84  [SCD400]  93.85,20.32 0 bottom
U$85  SPARKX-LOGO4  [SPARKX-MEDIUM]  123.19,30.48 0 top
U$86  [#3#3V#0]  121.92,11.05 90 top
U$87  [#SDA#0]  124.46,10.92 90 top
U$88  [#SCL#0]  127,10.79 90 top
U$89  [#3#3V#0]  121.92,11.05 90 bottom
U$90  [#SDA#0]  124.46,10.92 90 bottom
U$91  [#SCL#0]  127,10.79 90 bottom
U$92  [#GND#0]  119.38,10.92 90 top
U$93  [#GND#0]  119.38,10.92 90 bottom
U$94  [#I�C#1]  133.35,15.62 0 bottom
U$95  [PWR0]  111.63,24.77 90 top
U$96  [#LED#0]  115.57,22.48 0 bottom
U$97  SPARKX-LOGO4  [SPARKX-MEDIUM]  123.19,23.37 0 bottom
U$98  [QWIIC_5.5MM]  114.3,14.48 0 top
U$99  [CO1]  127.64,18.29 0 bottom
U$100  [QWIIC0]  119.38,27.94 0 top
U$101  [QWIIC0]  127,20.32 0 bottom
U$102  [SENSOR3]  120.52,18.29 0 bottom
U$103  [20]  125.6,17.53 0 bottom
U$104  [SCD400]  126.49,27.94 0 top
U$105  [SCD400]  119.76,20.32 0 bottom
U$106  SPARKX-LOGO4  [SPARKX-MEDIUM]  19.56,56.39 0 top
U$107  [#3#3V#0]  18.29,36.96 90 top
U$108  [#SDA#0]  20.83,36.83 90 top
U$109  [#SCL#0]  23.37,36.7 90 top
U$110  [#3#3V#0]  18.29,36.96 90 bottom
U$111  [#SDA#0]  20.83,36.83 90 bottom
U$112  [#SCL#0]  23.37,36.7 90 bottom
U$113  [#GND#0]  15.75,36.83 90 top
U$114  [#GND#0]  15.75,36.83 90 bottom
U$115  [#I�C#1]  29.72,41.53 0 bottom
U$116  [PWR0]  8,50.67 90 top
U$117  [#LED#0]  11.94,48.39 0 bottom
U$118  SPARKX-LOGO4  [SPARKX-MEDIUM]  19.56,49.28 0 bottom
U$119  [QWIIC_5.5MM]  10.67,40.39 0 top
U$120  [CO1]  24,44.2 0 bottom
U$121  [QWIIC0]  15.75,53.85 0 top
U$122  [QWIIC0]  23.37,46.23 0 bottom
U$123  [SENSOR3]  16.89,44.2 0 bottom
U$124  [20]  21.97,43.43 0 bottom
U$125  [SCD400]  22.86,53.85 0 top
U$126  [SCD400]  16.13,46.23 0 bottom
U$127  SPARKX-LOGO4  [SPARKX-MEDIUM]  45.47,56.39 0 top
U$128  [#3#3V#0]  44.2,36.96 90 top
U$129  [#SDA#0]  46.74,36.83 90 top
U$130  [#SCL#0]  49.28,36.7 90 top
U$131  [#3#3V#0]  44.2,36.96 90 bottom
U$132  [#SDA#0]  46.74,36.83 90 bottom
U$133  [#SCL#0]  49.28,36.7 90 bottom
U$134  [#GND#0]  41.66,36.83 90 top
U$135  [#GND#0]  41.66,36.83 90 bottom
U$136  [#I�C#1]  55.63,41.53 0 bottom
U$137  [PWR0]  33.91,50.67 90 top
U$138  [#LED#0]  37.85,48.39 0 bottom
U$139  SPARKX-LOGO4  [SPARKX-MEDIUM]  45.47,49.28 0 bottom
U$140  [QWIIC_5.5MM]  36.58,40.39 0 top
U$141  [CO1]  49.91,44.2 0 bottom
U$142  [QWIIC0]  41.66,53.85 0 top
U$143  [QWIIC0]  49.28,46.23 0 bottom
U$144  [SENSOR3]  42.8,44.2 0 bottom
U$145  [20]  47.88,43.43 0 bottom
U$146  [SCD400]  48.77,53.85 0 top
U$147  [SCD400]  42.04,46.23 0 bottom
U$148  SPARKX-LOGO4  [SPARKX-MEDIUM]  71.37,56.39 0 top
U$149  [#3#3V#0]  70.1,36.96 90 top
U$150  [#SDA#0]  72.64,36.83 90 top
U$151  [#SCL#0]  75.18,36.7 90 top
U$152  [#3#3V#0]  70.1,36.96 90 bottom
U$153  [#SDA#0]  72.64,36.83 90 bottom
U$154  [#SCL#0]  75.18,36.7 90 bottom
U$155  [#GND#0]  67.56,36.83 90 top
U$156  [#GND#0]  67.56,36.83 90 bottom
U$157  [#I�C#1]  81.53,41.53 0 bottom
U$158  [PWR0]  59.82,50.67 90 top
U$159  [#LED#0]  63.75,48.39 0 bottom
U$160  SPARKX-LOGO4  [SPARKX-MEDIUM]  71.37,49.28 0 bottom
U$161  [QWIIC_5.5MM]  62.48,40.39 0 top
U$162  [CO1]  75.82,44.2 0 bottom
U$163  [QWIIC0]  67.56,53.85 0 top
U$164  [QWIIC0]  75.18,46.23 0 bottom
U$165  [SENSOR3]  68.71,44.2 0 bottom
U$166  [20]  73.79,43.43 0 bottom
U$167  [SCD400]  74.68,53.85 0 top
U$168  [SCD400]  67.95,46.23 0 bottom
U$169  SPARKX-LOGO4  [SPARKX-MEDIUM]  97.28,56.39 0 top
U$170  [#3#3V#0]  96.01,36.96 90 top
U$171  [#SDA#0]  98.55,36.83 90 top
U$172  [#SCL#0]  101.09,36.7 90 top
U$173  [#3#3V#0]  96.01,36.96 90 bottom
U$174  [#SDA#0]  98.55,36.83 90 bottom
U$175  [#SCL#0]  101.09,36.7 90 bottom
U$176  [#GND#0]  93.47,36.83 90 top
U$177  [#GND#0]  93.47,36.83 90 bottom
U$178  [#I�C#1]  107.44,41.53 0 bottom
U$179  [PWR0]  85.73,50.67 90 top
U$180  [#LED#0]  89.66,48.39 0 bottom
U$181  SPARKX-LOGO4  [SPARKX-MEDIUM]  97.28,49.28 0 bottom
U$182  [QWIIC_5.5MM]  88.39,40.39 0 top
U$183  [CO1]  101.73,44.2 0 bottom
U$184  [QWIIC0]  93.47,53.85 0 top
U$185  [QWIIC0]  101.09,46.23 0 bottom
U$186  [SENSOR3]  94.62,44.2 0 bottom
U$187  [20]  99.7,43.43 0 bottom
U$188  [SCD400]  100.58,53.85 0 top
U$189  [SCD400]  93.85,46.23 0 bottom
U$190  SPARKX-LOGO4  [SPARKX-MEDIUM]  123.19,56.39 0 top
U$191  [#3#3V#0]  121.92,36.96 90 top
U$192  [#SDA#0]  124.46,36.83 90 top
U$193  [#SCL#0]  127,36.7 90 top
U$194  [#3#3V#0]  121.92,36.96 90 bottom
U$195  [#SDA#0]  124.46,36.83 90 bottom
U$196  [#SCL#0]  127,36.7 90 bottom
U$197  [#GND#0]  119.38,36.83 90 top
U$198  [#GND#0]  119.38,36.83 90 bottom
U$199  [#I�C#1]  133.35,41.53 0 bottom
U$200  [PWR0]  111.63,50.67 90 top
U$201  [#LED#0]  115.57,48.39 0 bottom
U$202  SPARKX-LOGO4  [SPARKX-MEDIUM]  123.19,49.28 0 bottom
U$203  [QWIIC_5.5MM]  114.3,40.39 0 top
U$204  [CO1]  127.64,44.2 0 bottom
U$205  [QWIIC0]  119.38,53.85 0 top
U$206  [QWIIC0]  127,46.23 0 bottom
U$207  [SENSOR3]  120.52,44.2 0 bottom
U$208  [20]  125.6,43.43 0 bottom
U$209  [SCD400]  126.49,53.85 0 top
U$210  [SCD400]  119.76,46.23 0 bottom
U$211  SPARKX-LOGO4  [SPARKX-MEDIUM]  19.56,82.3 0 top
U$212  [#3#3V#0]  18.29,62.86 90 top
U$213  [#SDA#0]  20.83,62.74 90 top
U$214  [#SCL#0]  23.37,62.61 90 top
U$215  [#3#3V#0]  18.29,62.86 90 bottom
U$216  [#SDA#0]  20.83,62.74 90 bottom
U$217  [#SCL#0]  23.37,62.61 90 bottom
U$218  [#GND#0]  15.75,62.74 90 top
U$219  [#GND#0]  15.75,62.74 90 bottom
U$220  [#I�C#1]  29.72,67.44 0 bottom
U$221  [PWR0]  8,76.58 90 top
U$222  [#LED#0]  11.94,74.3 0 bottom
U$223  SPARKX-LOGO4  [SPARKX-MEDIUM]  19.56,75.18 0 bottom
U$224  [QWIIC_5.5MM]  10.67,66.29 0 top
U$225  [CO1]  24,70.1 0 bottom
U$226  [QWIIC0]  15.75,79.76 0 top
U$227  [QWIIC0]  23.37,72.14 0 bottom
U$228  [SENSOR3]  16.89,70.1 0 bottom
U$229  [20]  21.97,69.34 0 bottom
U$230  [SCD400]  22.86,79.76 0 top
U$231  [SCD400]  16.13,72.14 0 bottom
U$232  SPARKX-LOGO4  [SPARKX-MEDIUM]  45.47,82.3 0 top
U$233  [#3#3V#0]  44.2,62.86 90 top
U$234  [#SDA#0]  46.74,62.74 90 top
U$235  [#SCL#0]  49.28,62.61 90 top
U$236  [#3#3V#0]  44.2,62.86 90 bottom
U$237  [#SDA#0]  46.74,62.74 90 bottom
U$238  [#SCL#0]  49.28,62.61 90 bottom
U$239  [#GND#0]  41.66,62.74 90 top
U$240  [#GND#0]  41.66,62.74 90 bottom
U$241  [#I�C#1]  55.63,67.44 0 bottom
U$242  [PWR0]  33.91,76.58 90 top
U$243  [#LED#0]  37.85,74.3 0 bottom
U$244  SPARKX-LOGO4  [SPARKX-MEDIUM]  45.47,75.18 0 bottom
U$245  [QWIIC_5.5MM]  36.58,66.29 0 top
U$246  [CO1]  49.91,70.1 0 bottom
U$247  [QWIIC0]  41.66,79.76 0 top
U$248  [QWIIC0]  49.28,72.14 0 bottom
U$249  [SENSOR3]  42.8,70.1 0 bottom
U$250  [20]  47.88,69.34 0 bottom
U$251  [SCD400]  48.77,79.76 0 top
U$252  [SCD400]  42.04,72.14 0 bottom
U$253  SPARKX-LOGO4  [SPARKX-MEDIUM]  71.37,82.3 0 top
U$254  [#3#3V#0]  70.1,62.86 90 top
U$255  [#SDA#0]  72.64,62.74 90 top
U$256  [#SCL#0]  75.18,62.61 90 top
U$257  [#3#3V#0]  70.1,62.86 90 bottom
U$258  [#SDA#0]  72.64,62.74 90 bottom
U$259  [#SCL#0]  75.18,62.61 90 bottom
U$260  [#GND#0]  67.56,62.74 90 top
U$261  [#GND#0]  67.56,62.74 90 bottom
U$262  [#I�C#1]  81.53,67.44 0 bottom
U$263  [PWR0]  59.82,76.58 90 top
U$264  [#LED#0]  63.75,74.3 0 bottom
U$265  SPARKX-LOGO4  [SPARKX-MEDIUM]  71.37,75.18 0 bottom
U$266  [QWIIC_5.5MM]  62.48,66.29 0 top
U$267  [CO1]  75.82,70.1 0 bottom
U$268  [QWIIC0]  67.56,79.76 0 top
U$269  [QWIIC0]  75.18,72.14 0 bottom
U$270  [SENSOR3]  68.71,70.1 0 bottom
U$271  [20]  73.79,69.34 0 bottom
U$272  [SCD400]  74.68,79.76 0 top
U$273  [SCD400]  67.95,72.14 0 bottom
U$274  SPARKX-LOGO4  [SPARKX-MEDIUM]  97.28,82.3 0 top
U$275  [#3#3V#0]  96.01,62.86 90 top
U$276  [#SDA#0]  98.55,62.74 90 top
U$277  [#SCL#0]  101.09,62.61 90 top
U$278  [#3#3V#0]  96.01,62.86 90 bottom
U$279  [#SDA#0]  98.55,62.74 90 bottom
U$280  [#SCL#0]  101.09,62.61 90 bottom
U$281  [#GND#0]  93.47,62.74 90 top
U$282  [#GND#0]  93.47,62.74 90 bottom
U$283  [#I�C#1]  107.44,67.44 0 bottom
U$284  [PWR0]  85.73,76.58 90 top
U$285  [#LED#0]  89.66,74.3 0 bottom
U$286  SPARKX-LOGO4  [SPARKX-MEDIUM]  97.28,75.18 0 bottom
U$287  [QWIIC_5.5MM]  88.39,66.29 0 top
U$288  [CO1]  101.73,70.1 0 bottom
U$289  [QWIIC0]  93.47,79.76 0 top
U$290  [QWIIC0]  101.09,72.14 0 bottom
U$291  [SENSOR3]  94.62,70.1 0 bottom
U$292  [20]  99.7,69.34 0 bottom
U$293  [SCD400]  100.58,79.76 0 top
U$294  [SCD400]  93.85,72.14 0 bottom
U$295  SPARKX-LOGO4  [SPARKX-MEDIUM]  123.19,82.3 0 top
U$296  [#3#3V#0]  121.92,62.86 90 top
U$297  [#SDA#0]  124.46,62.74 90 top
U$298  [#SCL#0]  127,62.61 90 top
U$299  [#3#3V#0]  121.92,62.86 90 bottom
U$300  [#SDA#0]  124.46,62.74 90 bottom
U$301  [#SCL#0]  127,62.61 90 bottom
U$302  [#GND#0]  119.38,62.74 90 top
U$303  [#GND#0]  119.38,62.74 90 bottom
U$304  [#I�C#1]  133.35,67.44 0 bottom
U$305  [PWR0]  111.63,76.58 90 top
U$306  [#LED#0]  115.57,74.3 0 bottom
U$307  SPARKX-LOGO4  [SPARKX-MEDIUM]  123.19,75.18 0 bottom
U$308  [QWIIC_5.5MM]  114.3,66.29 0 top
U$309  [CO1]  127.64,70.1 0 bottom
U$310  [QWIIC0]  119.38,79.76 0 top
U$311  [QWIIC0]  127,72.14 0 bottom
U$312  [SENSOR3]  120.52,70.1 0 bottom
U$313  [20]  125.6,69.34 0 bottom
U$314  [SCD400]  126.49,79.76 0 top
U$315  [SCD400]  119.76,72.14 0 bottom
U$316  SPARKX-LOGO4  [SPARKX-MEDIUM]  19.56,108.2 0 top
U$317  [#3#3V#0]  18.29,88.77 90 top
U$318  [#SDA#0]  20.83,88.65 90 top
U$319  [#SCL#0]  23.37,88.52 90 top
U$320  [#3#3V#0]  18.29,88.77 90 bottom
U$321  [#SDA#0]  20.83,88.65 90 bottom
U$322  [#SCL#0]  23.37,88.52 90 bottom
U$323  [#GND#0]  15.75,88.65 90 top
U$324  [#GND#0]  15.75,88.65 90 bottom
U$325  [#I�C#1]  29.72,93.34 0 bottom
U$326  [PWR0]  8,102.49 90 top
U$327  [#LED#0]  11.94,100.2 0 bottom
U$328  SPARKX-LOGO4  [SPARKX-MEDIUM]  19.56,101.09 0 bottom
U$329  [QWIIC_5.5MM]  10.67,92.2 0 top
U$330  [CO1]  24,96.01 0 bottom
U$331  [QWIIC0]  15.75,105.66 0 top
U$332  [QWIIC0]  23.37,98.04 0 bottom
U$333  [SENSOR3]  16.89,96.01 0 bottom
U$334  [20]  21.97,95.25 0 bottom
U$335  [SCD400]  22.86,105.66 0 top
U$336  [SCD400]  16.13,98.04 0 bottom
U$337  SPARKX-LOGO4  [SPARKX-MEDIUM]  45.47,108.2 0 top
U$338  [#3#3V#0]  44.2,88.77 90 top
U$339  [#SDA#0]  46.74,88.65 90 top
U$340  [#SCL#0]  49.28,88.52 90 top
U$341  [#3#3V#0]  44.2,88.77 90 bottom
U$342  [#SDA#0]  46.74,88.65 90 bottom
U$343  [#SCL#0]  49.28,88.52 90 bottom
U$344  [#GND#0]  41.66,88.65 90 top
U$345  [#GND#0]  41.66,88.65 90 bottom
U$346  [#I�C#1]  55.63,93.34 0 bottom
U$347  [PWR0]  33.91,102.49 90 top
U$348  [#LED#0]  37.85,100.2 0 bottom
U$349  SPARKX-LOGO4  [SPARKX-MEDIUM]  45.47,101.09 0 bottom
U$350  [QWIIC_5.5MM]  36.58,92.2 0 top
U$351  [CO1]  49.91,96.01 0 bottom
U$352  [QWIIC0]  41.66,105.66 0 top
U$353  [QWIIC0]  49.28,98.04 0 bottom
U$354  [SENSOR3]  42.8,96.01 0 bottom
U$355  [20]  47.88,95.25 0 bottom
U$356  [SCD400]  48.77,105.66 0 top
U$357  [SCD400]  42.04,98.04 0 bottom
U$358  SPARKX-LOGO4  [SPARKX-MEDIUM]  71.37,108.2 0 top
U$359  [#3#3V#0]  70.1,88.77 90 top
U$360  [#SDA#0]  72.64,88.65 90 top
U$361  [#SCL#0]  75.18,88.52 90 top
U$362  [#3#3V#0]  70.1,88.77 90 bottom
U$363  [#SDA#0]  72.64,88.65 90 bottom
U$364  [#SCL#0]  75.18,88.52 90 bottom
U$365  [#GND#0]  67.56,88.65 90 top
U$366  [#GND#0]  67.56,88.65 90 bottom
U$367  [#I�C#1]  81.53,93.34 0 bottom
U$368  [PWR0]  59.82,102.49 90 top
U$369  [#LED#0]  63.75,100.2 0 bottom
U$370  SPARKX-LOGO4  [SPARKX-MEDIUM]  71.37,101.09 0 bottom
U$371  [QWIIC_5.5MM]  62.48,92.2 0 top
U$372  [CO1]  75.82,96.01 0 bottom
U$373  [QWIIC0]  67.56,105.66 0 top
U$374  [QWIIC0]  75.18,98.04 0 bottom
U$375  [SENSOR3]  68.71,96.01 0 bottom
U$376  [20]  73.79,95.25 0 bottom
U$377  [SCD400]  74.68,105.66 0 top
U$378  [SCD400]  67.95,98.04 0 bottom
U$379  SPARKX-LOGO4  [SPARKX-MEDIUM]  97.28,108.2 0 top
U$380  [#3#3V#0]  96.01,88.77 90 top
U$381  [#SDA#0]  98.55,88.65 90 top
U$382  [#SCL#0]  101.09,88.52 90 top
U$383  [#3#3V#0]  96.01,88.77 90 bottom
U$384  [#SDA#0]  98.55,88.65 90 bottom
U$385  [#SCL#0]  101.09,88.52 90 bottom
U$386  [#GND#0]  93.47,88.65 90 top
U$387  [#GND#0]  93.47,88.65 90 bottom
U$388  [#I�C#1]  107.44,93.34 0 bottom
U$389  [PWR0]  85.73,102.49 90 top
U$390  [#LED#0]  89.66,100.2 0 bottom
U$391  SPARKX-LOGO4  [SPARKX-MEDIUM]  97.28,101.09 0 bottom
U$392  [QWIIC_5.5MM]  88.39,92.2 0 top
U$393  [CO1]  101.73,96.01 0 bottom
U$394  [QWIIC0]  93.47,105.66 0 top
U$395  [QWIIC0]  101.09,98.04 0 bottom
U$396  [SENSOR3]  94.62,96.01 0 bottom
U$397  [20]  99.7,95.25 0 bottom
U$398  [SCD400]  100.58,105.66 0 top
U$399  [SCD400]  93.85,98.04 0 bottom
U$400  SPARKX-LOGO4  [SPARKX-MEDIUM]  123.19,108.2 0 top
U$401  [#3#3V#0]  121.92,88.77 90 top
U$402  [#SDA#0]  124.46,88.65 90 top
U$403  [#SCL#0]  127,88.52 90 top
U$404  [#3#3V#0]  121.92,88.77 90 bottom
U$405  [#SDA#0]  124.46,88.65 90 bottom
U$406  [#SCL#0]  127,88.52 90 bottom
U$407  [#GND#0]  119.38,88.65 90 top
U$408  [#GND#0]  119.38,88.65 90 bottom
U$409  [#I�C#1]  133.35,93.34 0 bottom
U$410  [PWR0]  111.63,102.49 90 top
U$411  [#LED#0]  115.57,100.2 0 bottom
U$412  SPARKX-LOGO4  [SPARKX-MEDIUM]  123.19,101.09 0 bottom
U$413  [QWIIC_5.5MM]  114.3,92.2 0 top
U$414  [CO1]  127.64,96.01 0 bottom
U$415  [QWIIC0]  119.38,105.66 0 top
U$416  [QWIIC0]  127,98.04 0 bottom
U$417  [SENSOR3]  120.52,96.01 0 bottom
U$418  [20]  125.6,95.25 0 bottom
U$419  [SCD400]  126.49,105.66 0 top
U$420  [SCD400]  119.76,98.04 0 bottom
U$421  SPARKX-LOGO4  [SPARKX-MEDIUM]  19.56,134.11 0 top
U$422  [#3#3V#0]  18.29,114.68 90 top
U$423  [#SDA#0]  20.83,114.55 90 top
U$424  [#SCL#0]  23.37,114.43 90 top
U$425  [#3#3V#0]  18.29,114.68 90 bottom
U$426  [#SDA#0]  20.83,114.55 90 bottom
U$427  [#SCL#0]  23.37,114.43 90 bottom
U$428  [#GND#0]  15.75,114.55 90 top
U$429  [#GND#0]  15.75,114.55 90 bottom
U$430  [#I�C#1]  29.72,119.25 0 bottom
U$431  [PWR0]  8,128.4 90 top
U$432  [#LED#0]  11.94,126.11 0 bottom
U$433  SPARKX-LOGO4  [SPARKX-MEDIUM]  19.56,127 0 bottom
U$434  [QWIIC_5.5MM]  10.67,118.11 0 top
U$435  [CO1]  24,121.92 0 bottom
U$436  [QWIIC0]  15.75,131.57 0 top
U$437  [QWIIC0]  23.37,123.95 0 bottom
U$438  [SENSOR3]  16.89,121.92 0 bottom
U$439  [20]  21.97,121.16 0 bottom
U$440  [SCD400]  22.86,131.57 0 top
U$441  [SCD400]  16.13,123.95 0 bottom
U$442  SPARKX-LOGO4  [SPARKX-MEDIUM]  45.47,134.11 0 top
U$443  [#3#3V#0]  44.2,114.68 90 top
U$444  [#SDA#0]  46.74,114.55 90 top
U$445  [#SCL#0]  49.28,114.43 90 top
U$446  [#3#3V#0]  44.2,114.68 90 bottom
U$447  [#SDA#0]  46.74,114.55 90 bottom
U$448  [#SCL#0]  49.28,114.43 90 bottom
U$449  [#GND#0]  41.66,114.55 90 top
U$450  [#GND#0]  41.66,114.55 90 bottom
U$451  [#I�C#1]  55.63,119.25 0 bottom
U$452  [PWR0]  33.91,128.4 90 top
U$453  [#LED#0]  37.85,126.11 0 bottom
U$454  SPARKX-LOGO4  [SPARKX-MEDIUM]  45.47,127 0 bottom
U$455  [QWIIC_5.5MM]  36.58,118.11 0 top
U$456  [CO1]  49.91,121.92 0 bottom
U$457  [QWIIC0]  41.66,131.57 0 top
U$458  [QWIIC0]  49.28,123.95 0 bottom
U$459  [SENSOR3]  42.8,121.92 0 bottom
U$460  [20]  47.88,121.16 0 bottom
U$461  [SCD400]  48.77,131.57 0 top
U$462  [SCD400]  42.04,123.95 0 bottom
U$463  SPARKX-LOGO4  [SPARKX-MEDIUM]  71.37,134.11 0 top
U$464  [#3#3V#0]  70.1,114.68 90 top
U$465  [#SDA#0]  72.64,114.55 90 top
U$466  [#SCL#0]  75.18,114.43 90 top
U$467  [#3#3V#0]  70.1,114.68 90 bottom
U$468  [#SDA#0]  72.64,114.55 90 bottom
U$469  [#SCL#0]  75.18,114.43 90 bottom
U$470  [#GND#0]  67.56,114.55 90 top
U$471  [#GND#0]  67.56,114.55 90 bottom
U$472  [#I�C#1]  81.53,119.25 0 bottom
U$473  [PWR0]  59.82,128.4 90 top
U$474  [#LED#0]  63.75,126.11 0 bottom
U$475  SPARKX-LOGO4  [SPARKX-MEDIUM]  71.37,127 0 bottom
U$476  [QWIIC_5.5MM]  62.48,118.11 0 top
U$477  [CO1]  75.82,121.92 0 bottom
U$478  [QWIIC0]  67.56,131.57 0 top
U$479  [QWIIC0]  75.18,123.95 0 bottom
U$480  [SENSOR3]  68.71,121.92 0 bottom
U$481  [20]  73.79,121.16 0 bottom
U$482  [SCD400]  74.68,131.57 0 top
U$483  [SCD400]  67.95,123.95 0 bottom
U$484  SPARKX-LOGO4  [SPARKX-MEDIUM]  97.28,134.11 0 top
U$485  [#3#3V#0]  96.01,114.68 90 top
U$486  [#SDA#0]  98.55,114.55 90 top
U$487  [#SCL#0]  101.09,114.43 90 top
U$488  [#3#3V#0]  96.01,114.68 90 bottom
U$489  [#SDA#0]  98.55,114.55 90 bottom
U$490  [#SCL#0]  101.09,114.43 90 bottom
U$491  [#GND#0]  93.47,114.55 90 top
U$492  [#GND#0]  93.47,114.55 90 bottom
U$493  [#I�C#1]  107.44,119.25 0 bottom
U$494  [PWR0]  85.73,128.4 90 top
U$495  [#LED#0]  89.66,126.11 0 bottom
U$496  SPARKX-LOGO4  [SPARKX-MEDIUM]  97.28,127 0 bottom
U$497  [QWIIC_5.5MM]  88.39,118.11 0 top
U$498  [CO1]  101.73,121.92 0 bottom
U$499  [QWIIC0]  93.47,131.57 0 top
U$500  [QWIIC0]  101.09,123.95 0 bottom
U$501  [SENSOR3]  94.62,121.92 0 bottom
U$502  [20]  99.7,121.16 0 bottom
U$503  [SCD400]  100.58,131.57 0 top
U$504  [SCD400]  93.85,123.95 0 bottom
U$505  SPARKX-LOGO4  [SPARKX-MEDIUM]  123.19,134.11 0 top
U$506  [#3#3V#0]  121.92,114.68 90 top
U$507  [#SDA#0]  124.46,114.55 90 top
U$508  [#SCL#0]  127,114.43 90 top
U$509  [#3#3V#0]  121.92,114.68 90 bottom
U$510  [#SDA#0]  124.46,114.55 90 bottom
U$511  [#SCL#0]  127,114.43 90 bottom
U$512  [#GND#0]  119.38,114.55 90 top
U$513  [#GND#0]  119.38,114.55 90 bottom
U$514  [#I�C#1]  133.35,119.25 0 bottom
U$515  [PWR0]  111.63,128.4 90 top
U$516  [#LED#0]  115.57,126.11 0 bottom
U$517  SPARKX-LOGO4  [SPARKX-MEDIUM]  123.19,127 0 bottom
U$518  [QWIIC_5.5MM]  114.3,118.11 0 top
U$519  [CO1]  127.64,121.92 0 bottom
U$520  [QWIIC0]  119.38,131.57 0 top
U$521  [QWIIC0]  127,123.95 0 bottom
U$522  [SENSOR3]  120.52,121.92 0 bottom
U$523  [20]  125.6,121.16 0 bottom
U$524  [SCD400]  126.49,131.57 0 top
U$525  [SCD400]  119.76,123.95 0 bottom